# Altium PCB PCB001.PcbDoc
Units mm, origin at the board's own origin, x right, y up, seen from the top; angles counter-clockwise.
Board outline 60 x 60 mm, 4 copper layers (Top Layer, Ground Plane, Power Plane, Bottom Layer), stack 1.561 mm thick; 93 components, 70 nets, 307 pads, 114 vias.
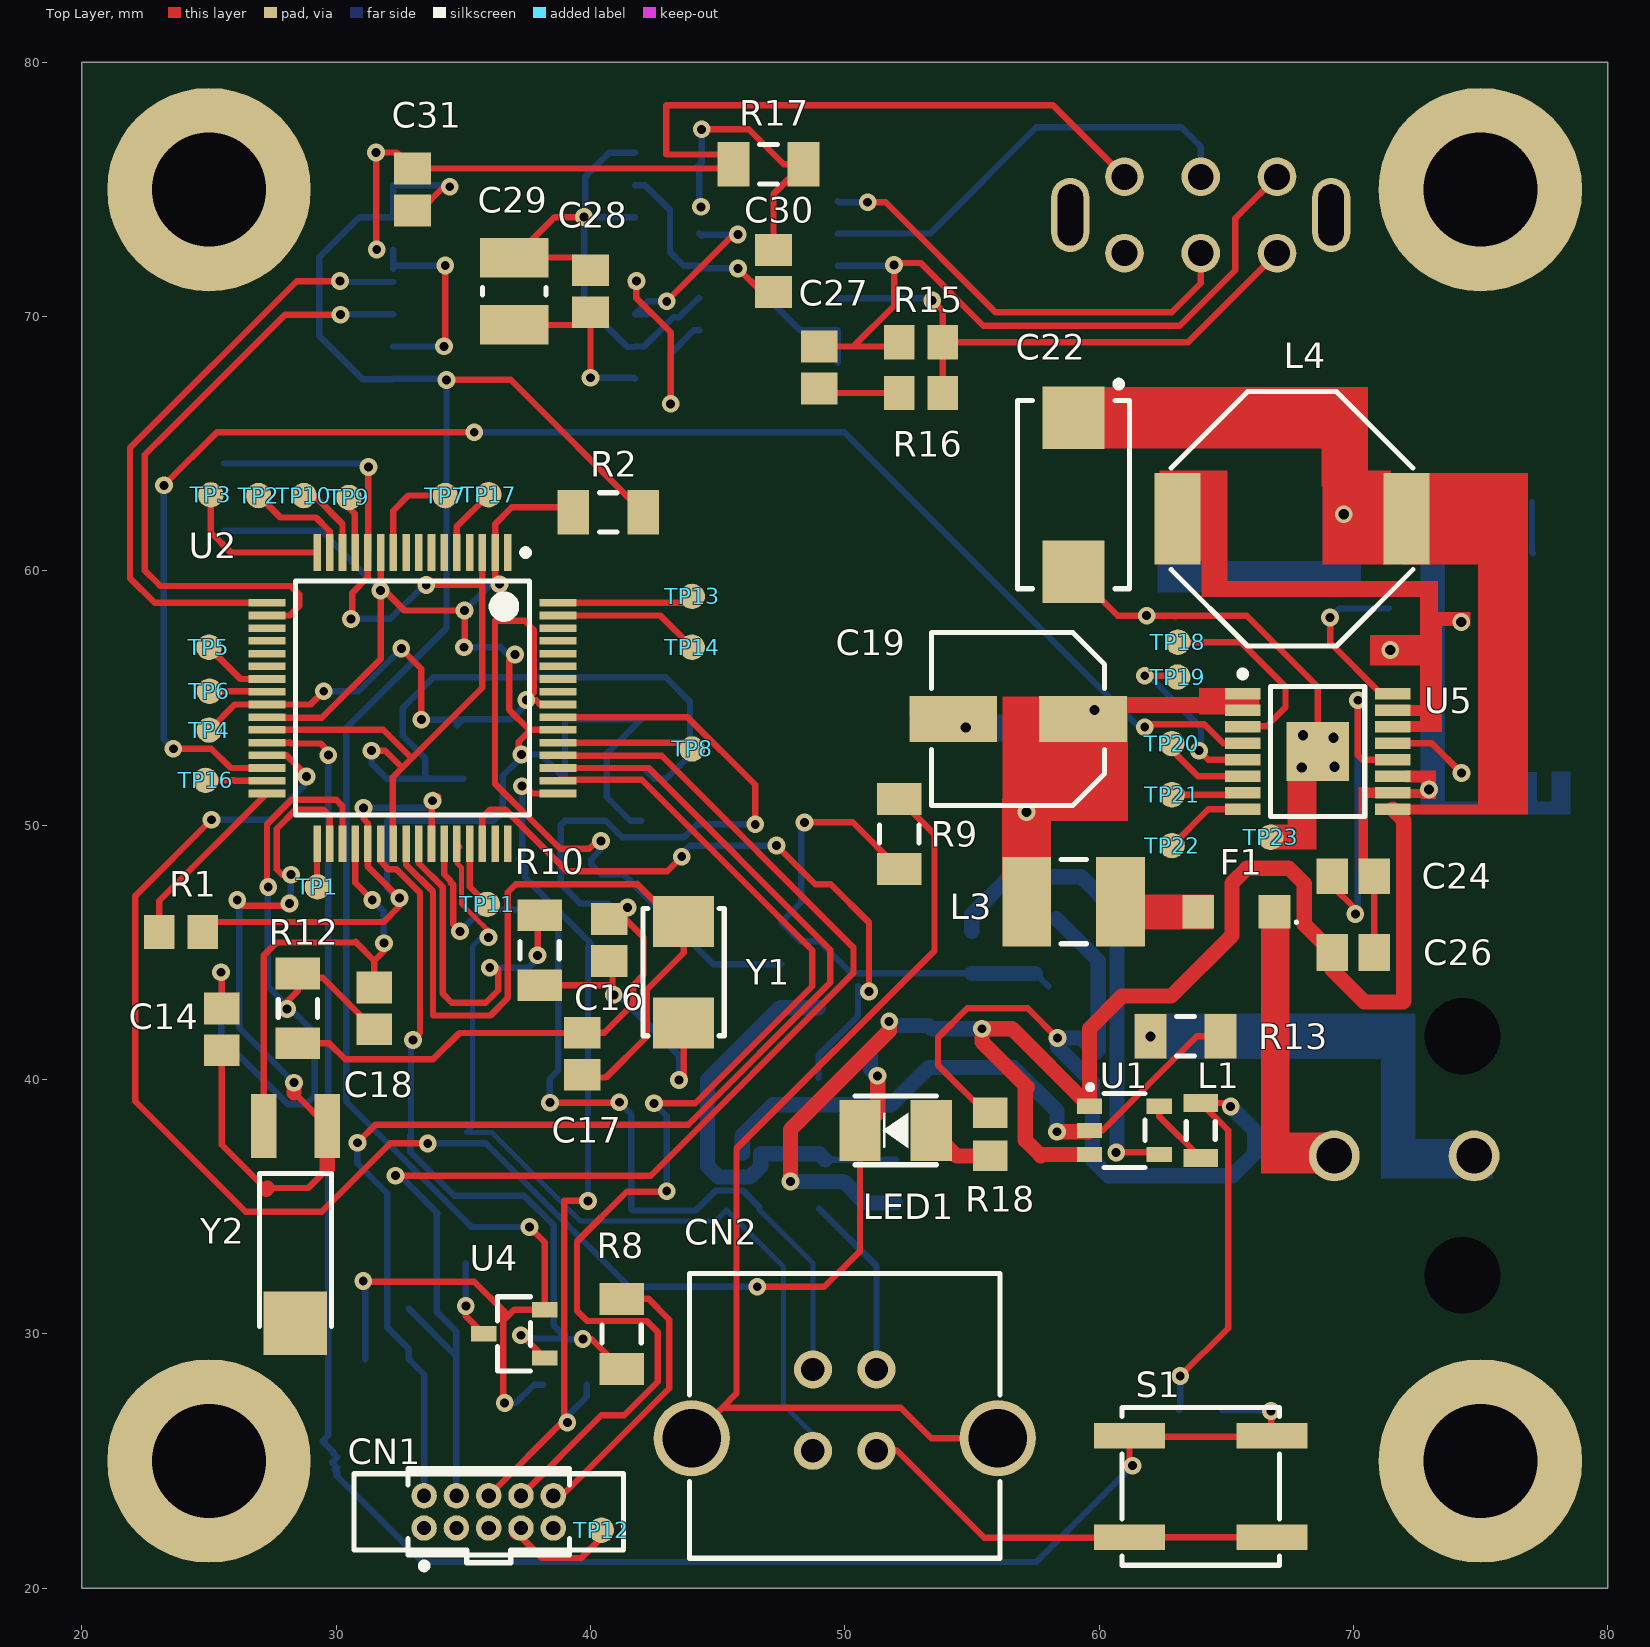
[diagram p0: Top Layer view]
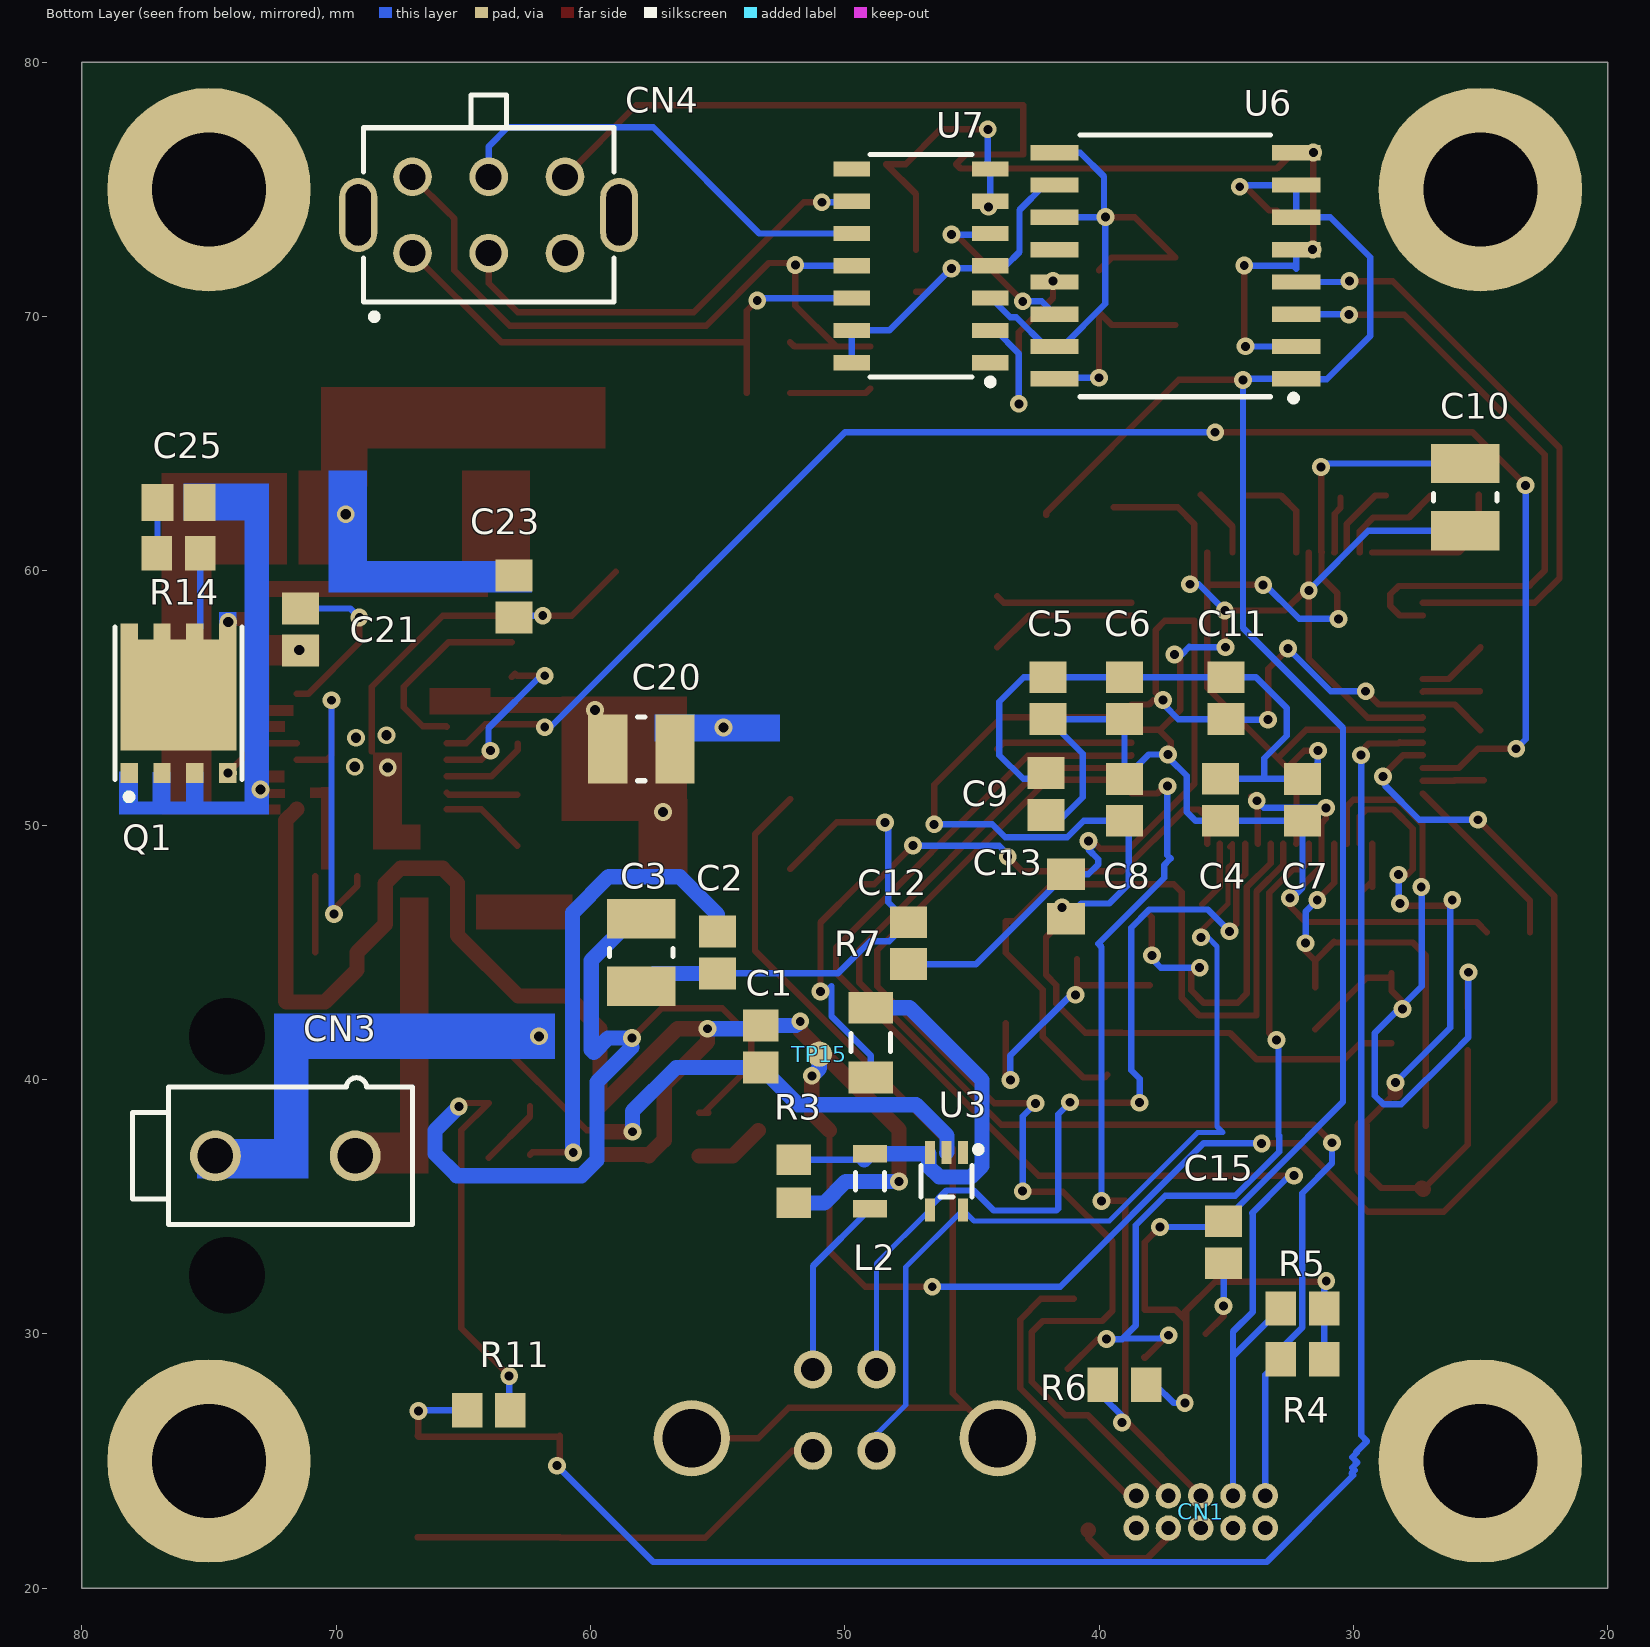
[diagram p1: Bottom Layer view, seen from below]
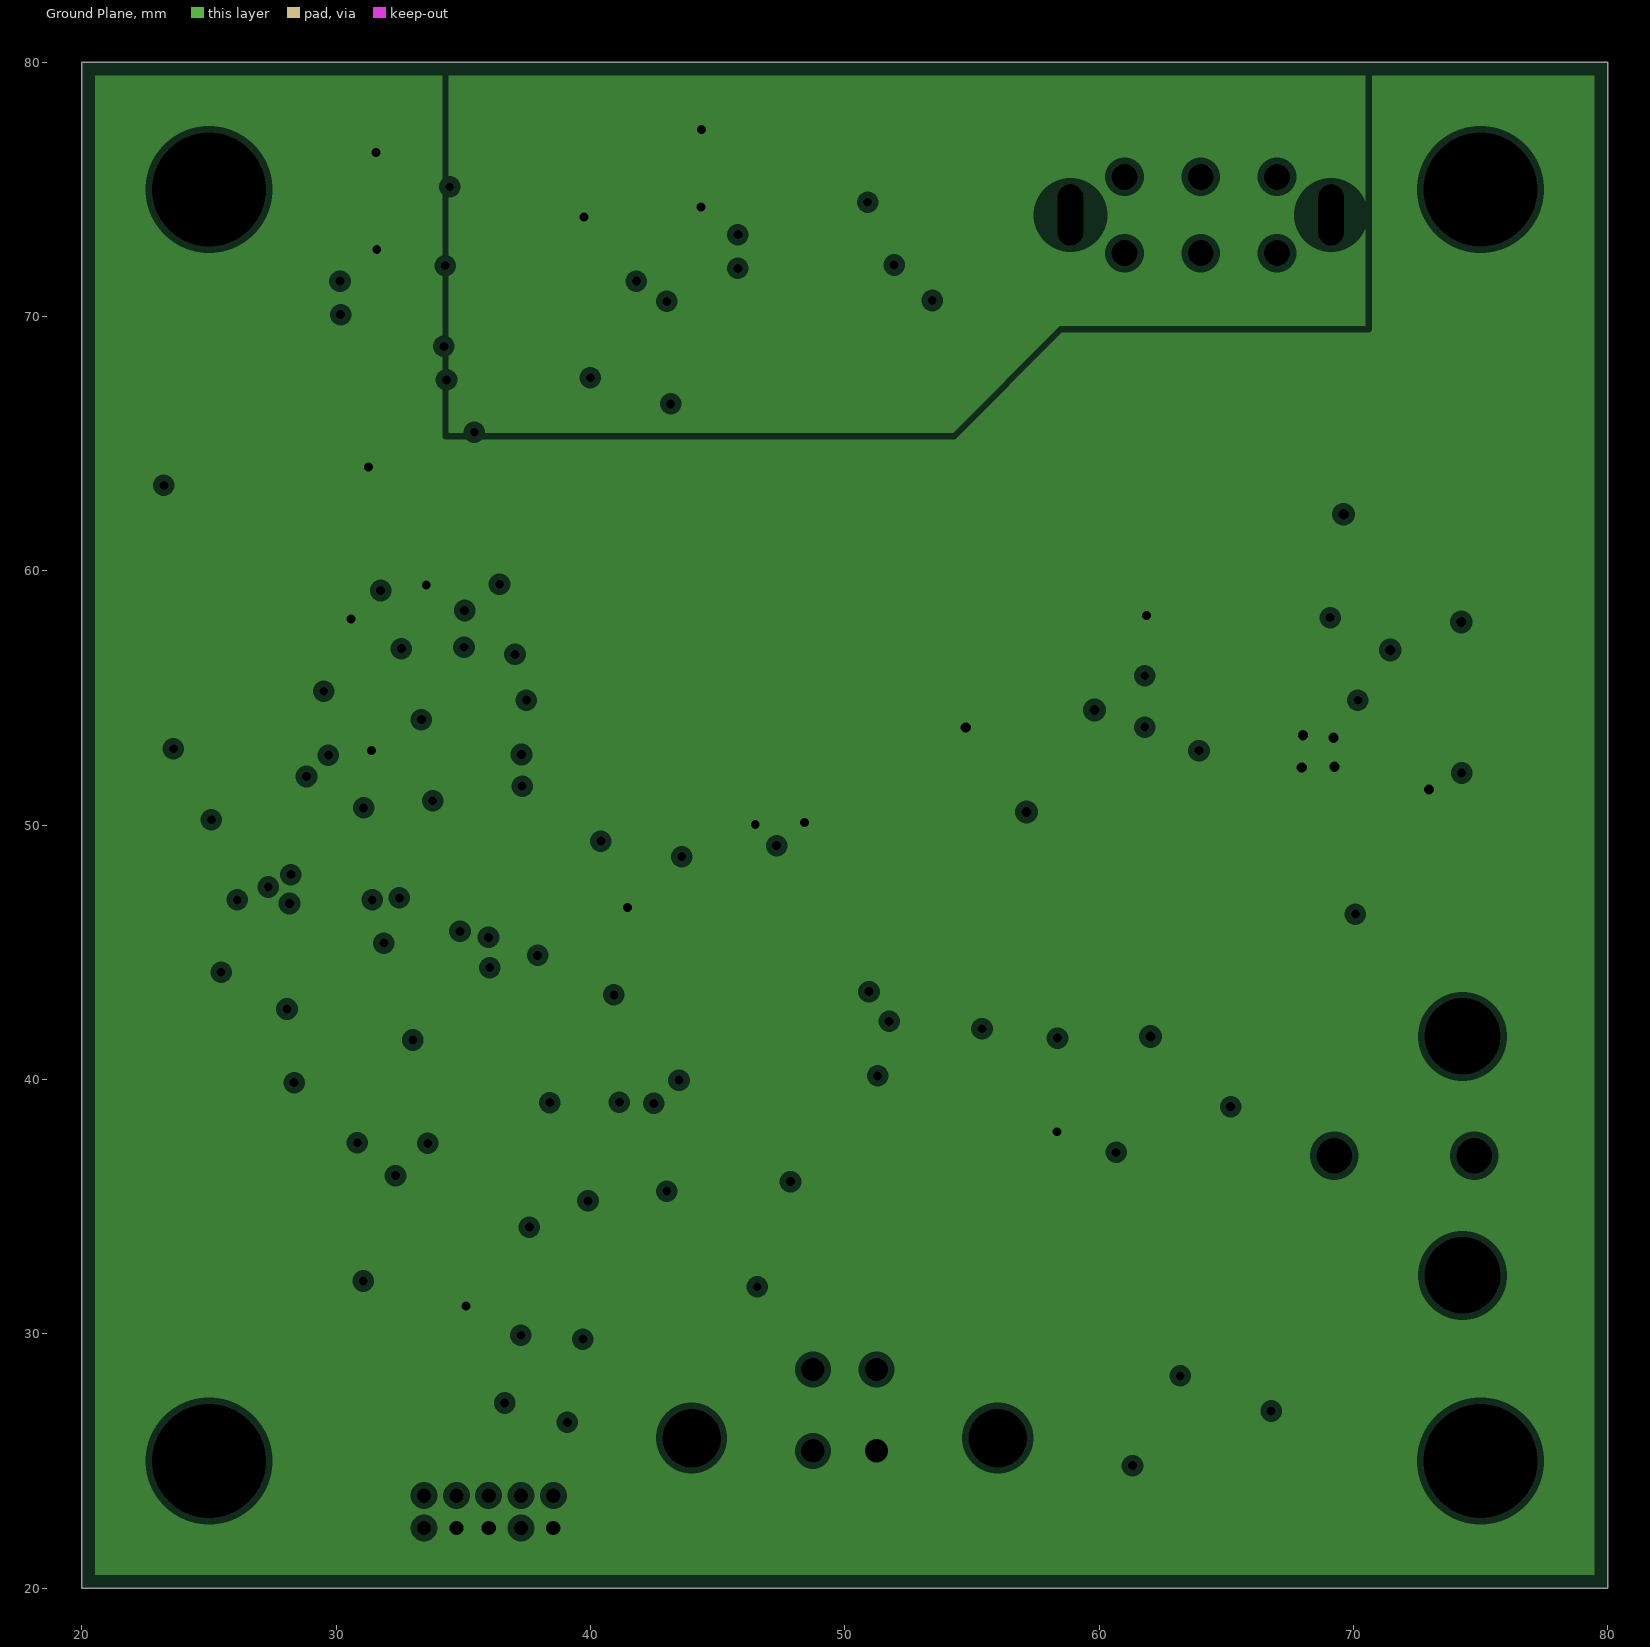
[diagram p2: Ground Plane, clearances drawn from the general rule]
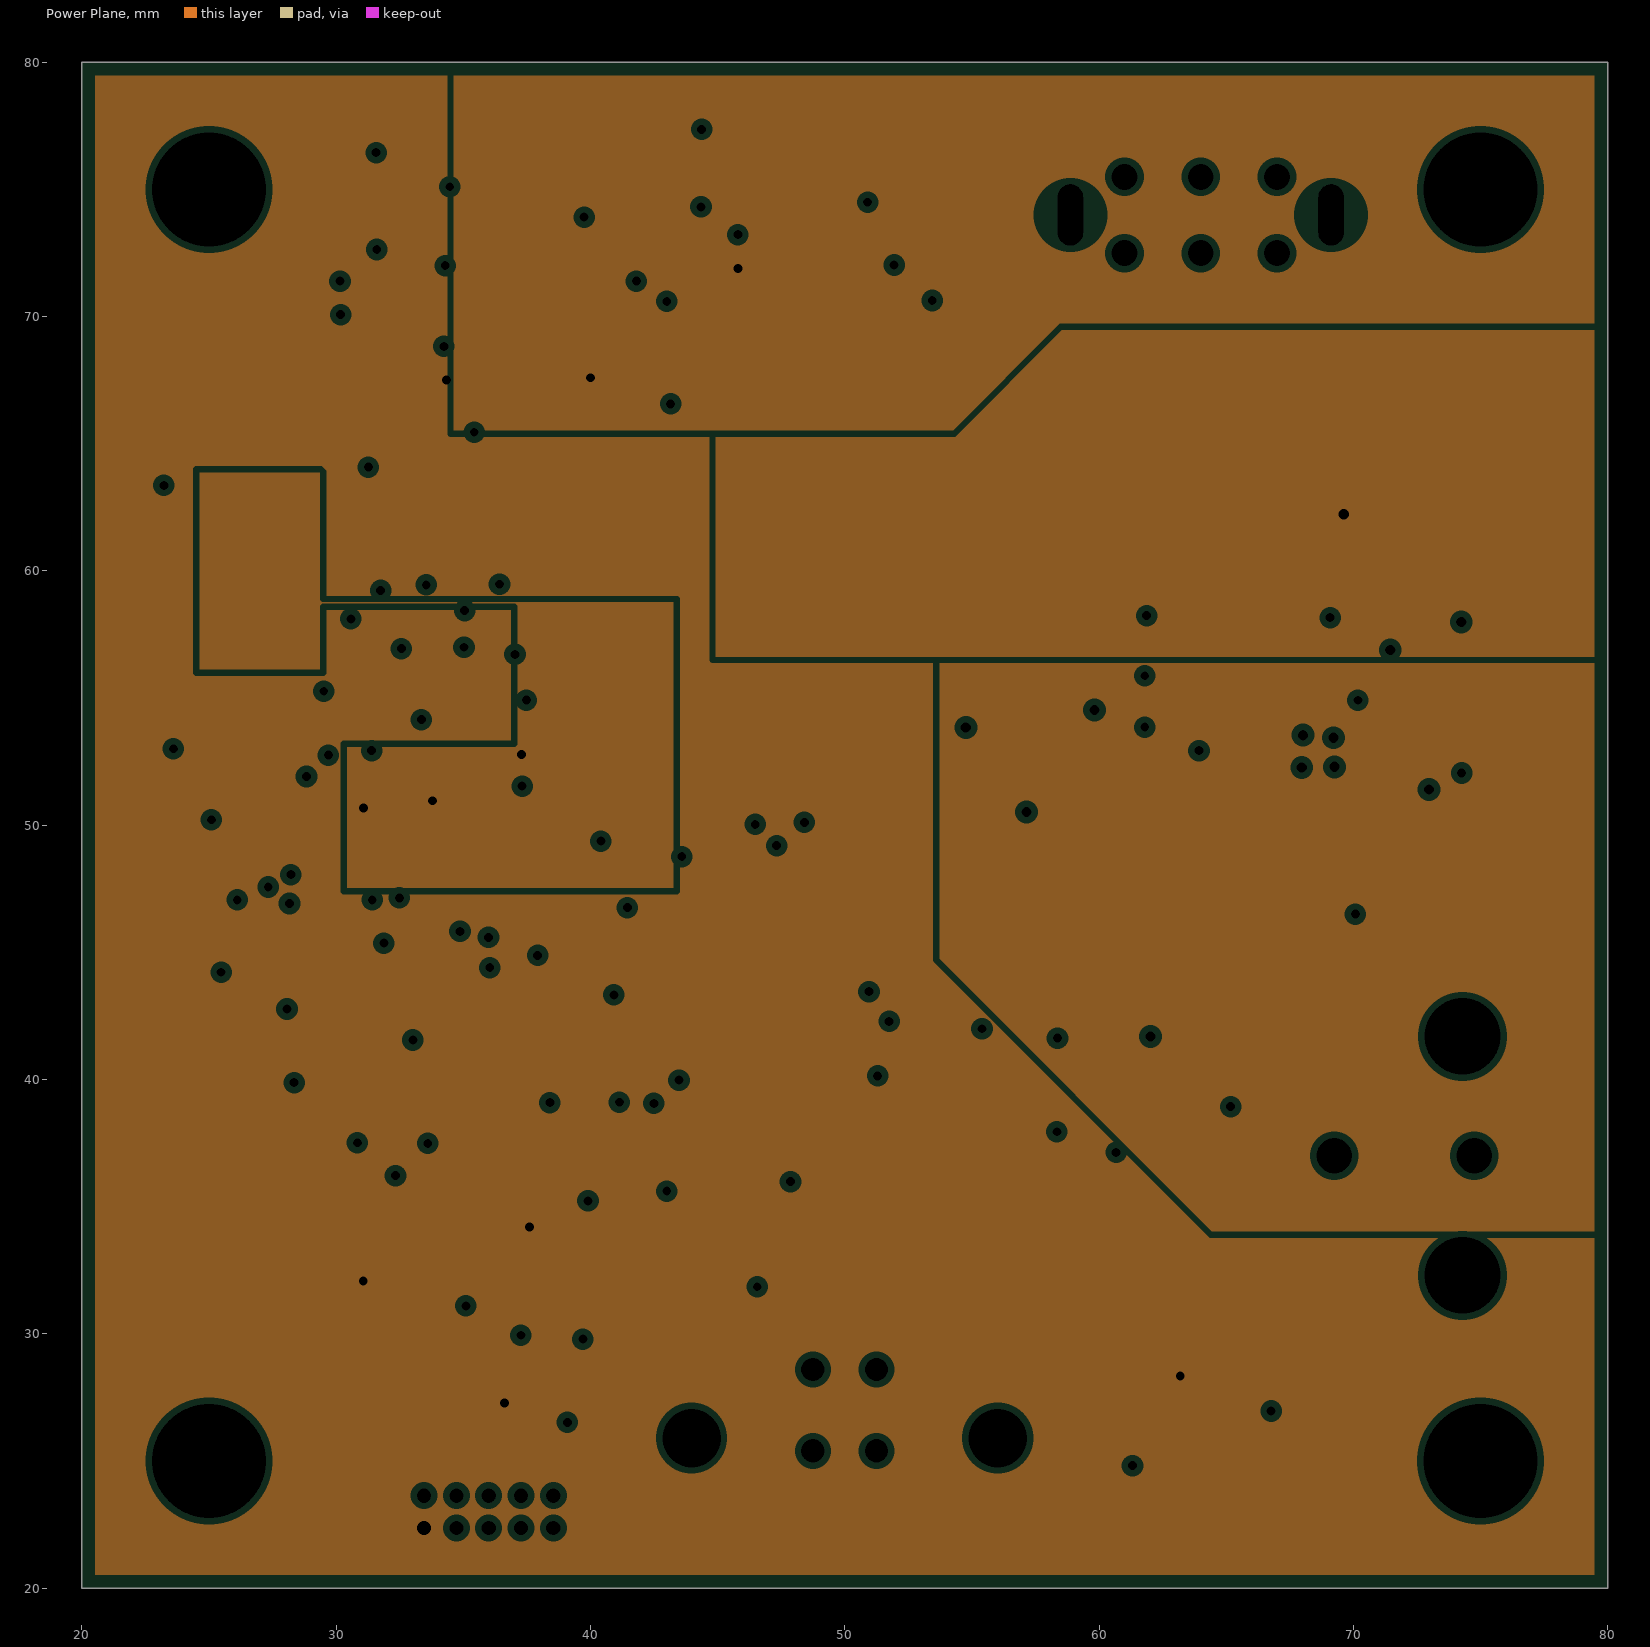
[diagram p3: Power Plane, clearances drawn from the general rule]
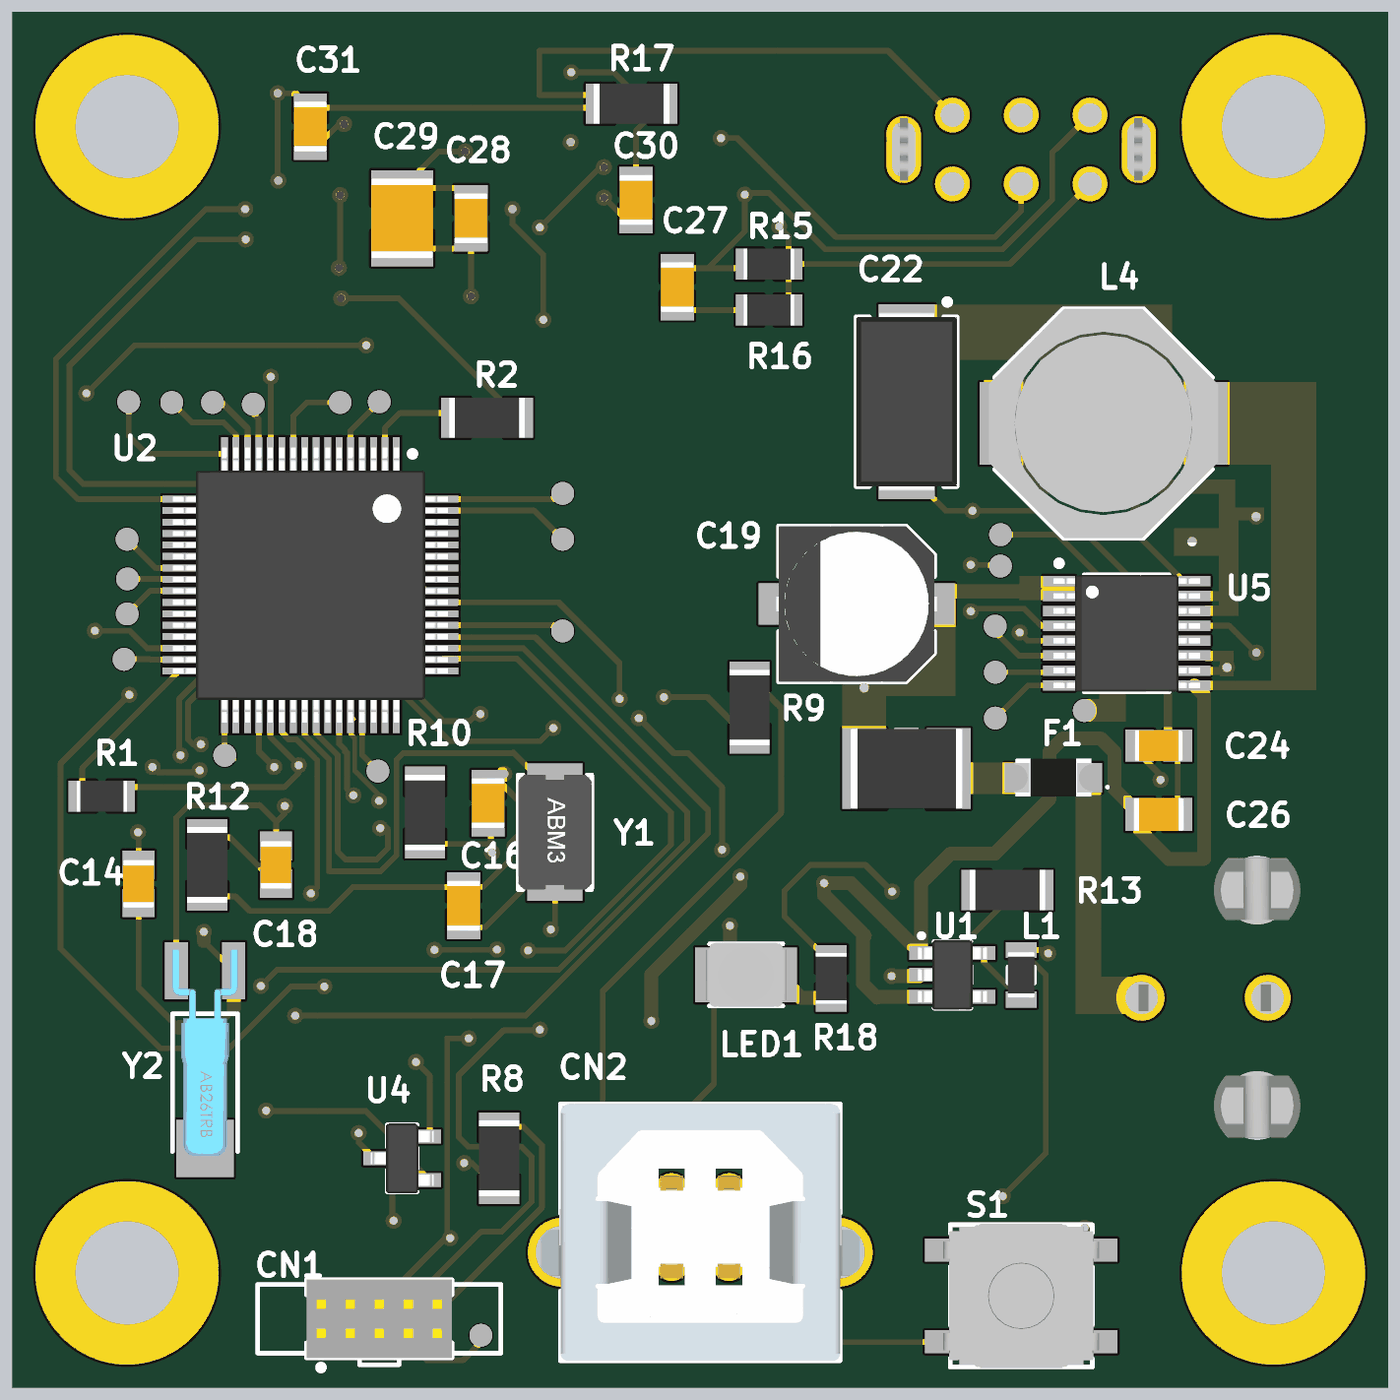
[diagram p4: 3D render of the assembled board from above, using the file's embedded part models]
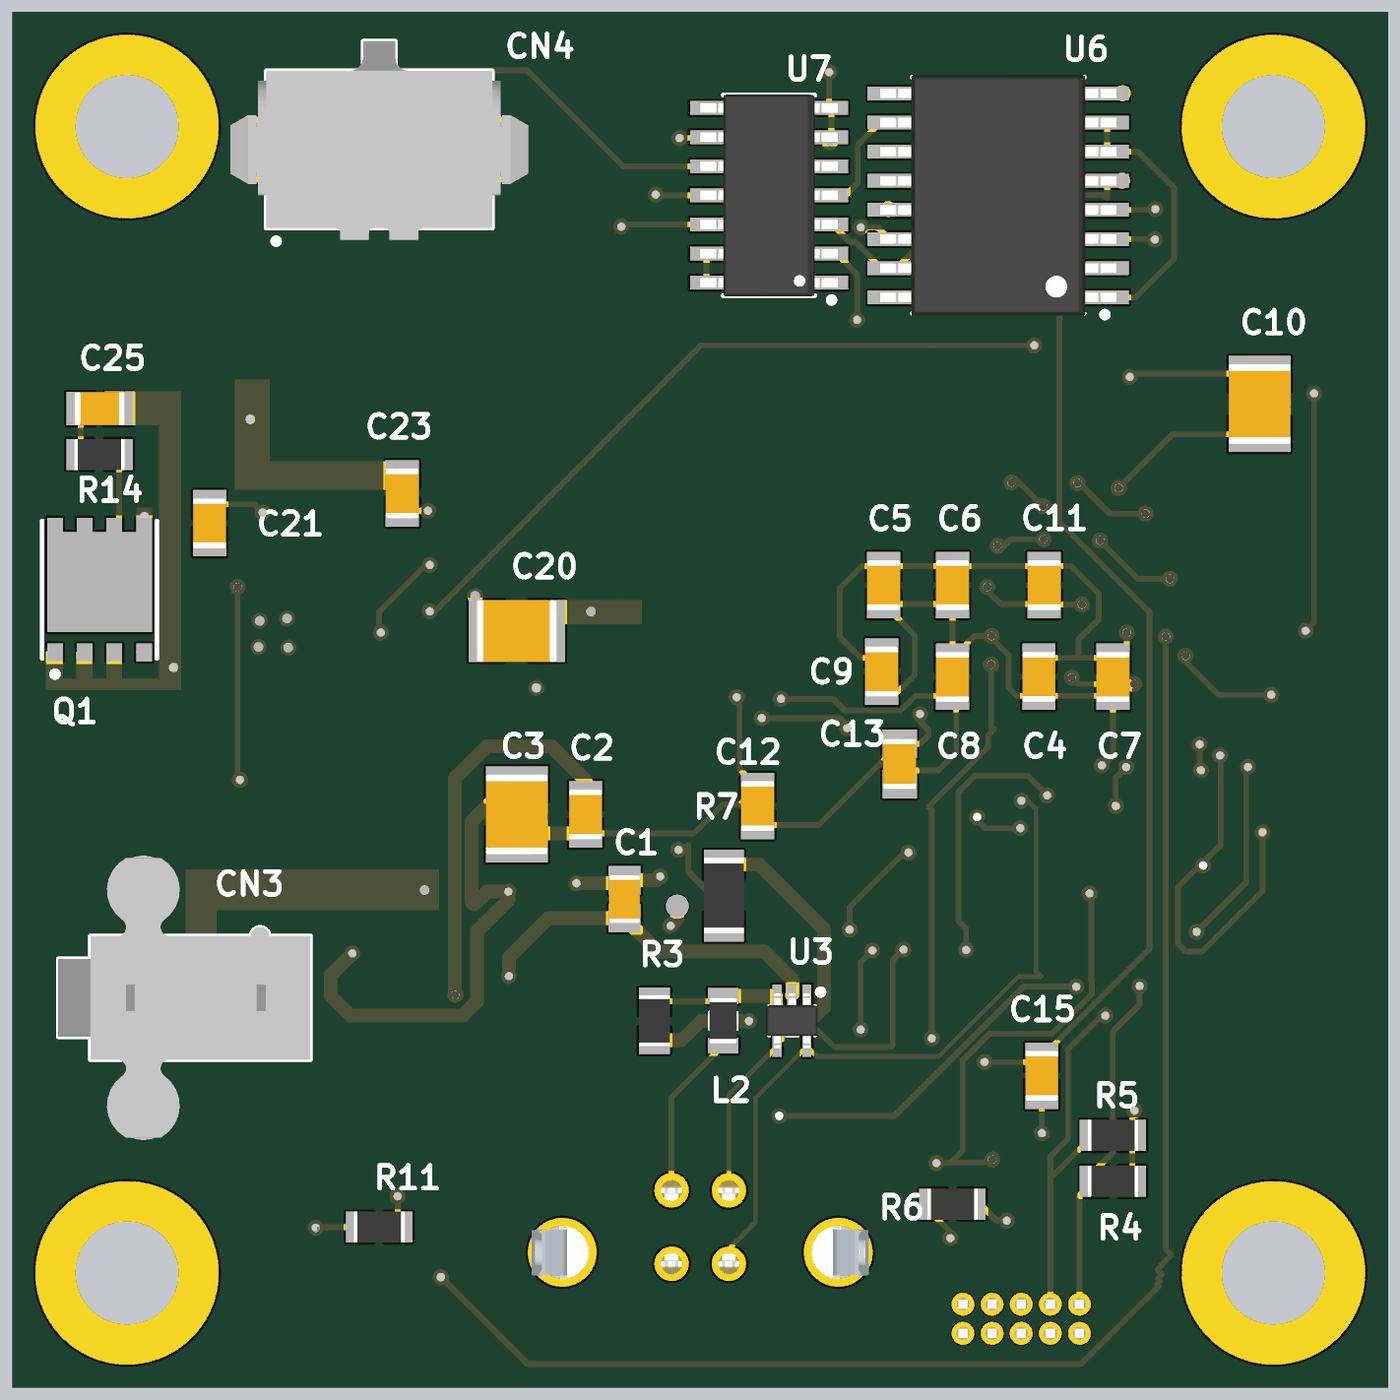
[diagram p5: 3D render of the assembled board from below, using the file's embedded part models]

## Layer stack, top to bottom
Top Solder: solder mask 0.0102, Solder Resist, Dk 3.5
Top Layer: signal copper 0.018
Dielectric 1: core 0.4572, Core-035, Dk 4.7
Ground Plane: plane copper 0.035, net (Multiple Nets)
Dielectric 2: prepreg 0.1803, PP-021, Dk 4.7
Dielectric 3: prepreg 0.1803, PP-021, Dk 4.7
Dielectric 4: prepreg 0.1803, PP-021, Dk 4.7
Power Plane: plane copper 0.035, net (Multiple Nets)
Dielectric 5: core 0.4572, Core-035, Dk 4.7
Bottom Layer: signal copper 0.018
Bottom Solder: solder mask 0.0102, Solder Resist, Dk 3.5

## Board outline
20,20 20,80 80,80 80,20

## Design rules (kind name [scope] priority, off if disabled: settings)
Clearance [All] p1: gap=0.2 ignorepadtopadclearanceinfootprint=FALSE except(0: Arc-Hole Track-Hole SMDPad-Hole THPad-Hole Via-Hole Fill-Hole Poly-Hole Region-Hole Text-Hole; 0.1: Arc-Arc Arc-Track Arc-SMDPad Arc-Text Track-Track Track-SMDPad Track-Text SMDPad-SMDPad SMDPad-Text THPad-Text Via-Text Fill-Text Poly-Text Region-Text Text-Text)
HoleSize [All] p1: absolutevalues=TRUE maxlimit=10 minlimit=0.025 maxpercent=80.000 minpercent=20.000
MinimumSolderMaskSliver [All] p1: minsoldermaskwidth=0.1
PlaneClearance [All] p1: clearance=0.25
PlaneConnect VddPlaneConnect [InNet('VDD')] p1: planeconnectstyle=Direct reliefexpansion=0.508 reliefentries=4 reliefconductorwidth=0.254 reliefairgap=0.254
PlaneConnect [All] p2: planeconnectstyle=Relief reliefexpansion=0.508 reliefentries=4 reliefconductorwidth=0.254 reliefairgap=0.254
PolygonConnect [All] p1: connectstyle=Relief reliefconductorwidth=0.254 reliefentries=4 polygonreliefangle="90 Angle" airgapwidth=0.254
RoomDefinition Sheet2 [InComponentClass('Sheet2')] p1: confinementstyle=ConfineIn formatcopy=TRUE lockcomponents=FALSE outline 30,30 79,30 79,80 30,80
RoomDefinition Sheet1 [InComponentClass('Sheet1')] p2: confinementstyle=ConfineIn formatcopy=TRUE lockcomponents=FALSE outline 20,20 69,20 69,68 20,68
RoutingVias [All] p1: holewidth=0.35 width=0.7 viastyle="Through Hole" minholewidth=0.25 minwidth=0.5 maxholewidth=1 maxwidth=2
SilkToSilkClearance [All] p1: silktosilkclearance=0
SilkToSolderMaskClearance [IsPad] p1: minsilkscreentomaskgap=0.01 clearancetoexposedcopper=TRUE
SolderMaskExpansion [All] p1: expansion=0.102 istentingtop=FALSE
Width [All] p1: maxlimit=2 minlimit=0.1 preferedwidth=0.25
24 further rules are at their usual default settings.

## Classes and differential pairs
component class Sheet2: C19 C20 C21 C22 C23 C24 C25 C26 C27 C28 C29 C30 C31 CN3 CN4 F1 L3 Q1 R13 R14 R15 R16 R17 TP18 TP19 TP20 TP21 TP22 TP23 U6 U7
component class Sheet1: C1 C2 C3 C4 C5 C6 C7 C8 C9 C10 C11 C12 C13 C14 C15 C16 C17 C18 CN1 CN2 L1 L2 LED1 R1 R2 R3 R4 R5 R6 R7 R8 R9 R10 R11 R12 R18 S1 TP1 TP2 TP3 TP4 TP5 TP6 TP7 TP8 TP9 TP10 TP11 TP12 TP13 TP14 TP15 TP16 TP17 U1 U2 U3 U4 Y1 Y2

## Components (designator, comment, footprint, x,y, rotation, side; value= is the part's Value field where it differs from the comment)
C1 "1µF" CAPC2012X135N 53.3,41.3 r270 bottom
C2 "0.01µF" CAPC2012X78N 55,45 r270 bottom
C3 "10µF" CAPC3225X250N 58,45 r270 bottom
C4 "0.1µF" CAPC2012X125N 35.23,51.003 r270 bottom
C5 "0.1µF" CAPC2012X125N 42,55 r270 bottom
C6 "0.1µF" CAPC2012X125N 39,55 r270 bottom
C7 "0.1µF" CAPC2012X125N 32,51 r270 bottom
C8 "0.01µF" CAPC2012X78N 39,51 r90 bottom
C9 "0.01µF" CAPC2012X78N 42.088,51.232 r270 bottom
C10 "10µF" CAPC3225X250N 25.6,62.9 r270 bottom
C11 "0.1µF" CAPC2012X125N 35,55 r270 bottom
C12 "0.1µF" CAPC2012X125N 47.498,45.364 r270 bottom
C13 "2.2µF" CAPC2012X145N 41.3,47.2 r270 bottom
C14 "24pF" CAPC2012X75N 25.5,41.975 r90 top
C15 "0.1µF" CAPC2012X125N 35.1,33.6 r270 bottom
C16 "10pF" CAPC2012X94N 40.742,45.491 r90 top
C17 "10pF" CAPC2012X94N 39.678,41.014 r90 top
C18 "24pF" CAPC2012X75N 31.5,42.8 r90 top
C19 "100µF" CAPAE660X770N 56.82,54.178 r180 top
C20 "10µF" CAPC3225X250N 58,53 r180 bottom
C21 "0.1µF" CAPC2012X125N 71.4,57.7 r270 bottom
C22 "180µF" CAPMP7343X190N 59,63 r270 top
C23 "0.1µF" CAPC2012X125N 63,59 r270 bottom
C24 "1µF" CAPC2012X135N 70,48 r0 top
C25 "1500pF" CAPC2012X100N 76.2,62.7 r180 bottom
C26 "0.1µF" CAPC2012X125N 70,45 r0 top
C27 "4700pF" CAPC2012X78N 49,68 r90 top
C28 "0.1µF" CAPC2012X125N 40,71 r90 top
C29 "10µF" CAPC3225X250N 37,71 r90 top
C30 "0.1µF" CAPC2012X125N 47.2,71.8 r90 top
C31 "0.1µF" CAPC2012X125N 33,75 r90 top
CN1 "GRPB052VWVN-RC" SULLINS_GRPB052VWVN-RC 36,23 r0 bottom
CN2 "61400413321" WURTH_61400413321 50,27 r0 top
CN3 "39-29-9029" MOLEX_39-29-9029 72,37 r90 bottom locked
CN4 "3-794682-6" TYCO_3-794682-6 64,74 r180 bottom
F1 "3A, 32V" FUSE_0468XXX.NR 65.4,46.6 r180 top
L1 "742792093" INDC2012X90N 64,38 r90 top
L2 "742792093" INDC2012X90N 49,36 r270 bottom
L3 "FBMH4532HM132-T" INDC4532X350N 59,47 r180 top
L4 "15µH" IND_SRU1038-150Y 67.589,62.052 r0 top
LED1 "597-3121-207F" DIALIGHT_597-3121-207F 52,38 r0 top
Q1 "CSD16321Q5" TI_CSD16321Q5 76.2,54.8 r90 bottom
R1 "1M" RESC2012X60N 23.9,45.8 r0 top
R2 "0" RESC3216X60N 40.7,62.3 r0 top
R3 "DNP" RESC2012X60N 52,36 r270 bottom
R4 "10k" RESC2012X60N 32,29 r180 bottom
R5 "10k" RESC2012X60N 32,31 r180 bottom
R6 "10k" RESC2012X60N 39,28 r180 bottom
R7 "0" RESC3216X60N 48.971,41.453 r90 bottom
R8 "0" RESC3216X60N 41.224,29.997 r90 top
R9 "0" RESC3216X60N 52.146,49.657 r90 top
R10 "0" RESC3216X60N 37.998,45.085 r90 top
R11 "10k" RESC2012X60N 64,27 r180 bottom
R12 "0" RESC3216X60N 28.5,42.8 r90 top
R13 "0" RESC3216X60N 63.4,41.7 r180 top
R14 "4.7" RESC2012X60N 76.2,60.7 r180 bottom
R15 "DNP" RESC2012X60N 53,69 r0 top
R16 "110" RESC2012X60N 53,67 r0 top
R17 "0" RESC3216X60N 47,76 r180 top
R18 "1.5k" RESC2012X60N 55.721,37.848 r90 top
S1 "KSC241JLFS" SW_KSC241JLFS 64,24 r180 top locked
TP1 "TESTPOINT100" TP100 29.261,47.574 r0 top
TP2 "TESTPOINT100" TP100 26.949,62.967 r0 top
TP3 "TESTPOINT100" TP100 25.07,62.992 r0 top
TP4 "TESTPOINT100" TP100 25.006,53.743 r0 top
TP5 "TESTPOINT100" TP100 25,57 r0 top
TP6 "TESTPOINT100" TP100 25.019,55.27 r0 top
TP7 "TESTPOINT100" TP100 34.29,62.967 r0 top
TP8 "TESTPOINT100" TP100 44,53 r0 top
TP9 "TESTPOINT100" TP100 30.505,62.89 r0 top
TP10 "TESTPOINT100" TP100 28.727,62.967 r90 top
TP11 "TESTPOINT100" TP100 35.941,46.888 r90 top
TP12 "TESTPOINT100" TP100 40.432,22.279 r90 top
TP13 "TESTPOINT100" TP100 44,59 r90 top
TP14 "TESTPOINT100" TP100 44,57 r90 top
TP15 "TESTPOINT100" TP100 51,41 r90 bottom
TP16 "TESTPOINT100" TP100 24.867,51.765 r90 top
TP17 "TESTPOINT100" TP100 36,63 r90 top
TP18 "TESTPOINT100" TP100 63.1,57.2 r90 top
TP19 "TESTPOINT100" TP100 63.094,55.829 r90 top
TP20 "TESTPOINT100" TP100 62.865,53.213 r90 top
TP21 "TESTPOINT100" TP100 62.871,51.2 r90 top
TP22 "TESTPOINT100" TP100 62.871,49.2 r90 top
TP23 "TESTPOINT100" TP100 66.751,49.53 r90 top
U1 "TPS73233DBVT" SOT95P280X145-5N 61,38 r0 top
U2 "TM4C123GH6PMI" QFP50P1200X1200X140-64N 33,55 r270 top
U3 "SP3003-02JTG" SOT65P220X90-5N 46,36 r270 bottom
U4 "DS1818R-10+T&R" SOT95P235X100-3N 37,30 r180 top
U5 "TPS54357PWP" SOP65P640X120-17AN 68.6,52.9 r0 top
U6 "ADUM5201ARWZ" SOIC127P1030X265-16N 37,72 r0 bottom
U7 "ADM3491ARZ" SOIC127P600X175-14N 47,72 r0 bottom
Y1 "16 MHz" XTAL500X320X130 43.663,44.221 r0 top
Y2 "32.768 kHz" ABRACON_AB26TRB-32.768KHZ-T 28.4,34.3 r90 top

## Footprints (in the part's own frame and the unit in brackets; to place one, negate y for a bottom-side part, rotate by r counter-clockwise, add the part's x,y. Pads: shape width x height; smd on the part's side, far side on the other; paste and mask are expansions set on the pad)
ABRACON_AB26TRB-32.768KHZ-T [mm] "Low Frequency Cylindrical Watch Crystal"
  rect 2.5x2.5 smd: 0(-3.875,0)
  rect 2.5x1 smd: 1(3.875,1.25) 2(3.875,-1.25)
  silkscreen extent -4,-1.42 2,1.42, body extent -4.2,-1.42 4.8,1.42, height 2.25
CAPAE660X770N [mm] "Aluminum Electrolytic Capacitor, Body 6.60x6.60x8.00mm, IPC Low Density"
  rect 3.45x1.8 smd: 1(-2.55,0) 2(2.55,0)
  Top Layer keep-out region: -4.4,1
  Top Layer keep-out region: -4.4,1
  silkscreen extent -3.4,-3.4 3.4,3.4, body extent -3.5,-3.4 3.5,3.4, height 8
CAPC2012X75N [mm] "Chip Capacitor, 2-Leads, Body 2.00x1.25mm, IPC Medium Density"
  rect 1.25x1.4 smd: 1(-0.825,0) 2(0.825,0)
  body extent -1.05,-0.67 1.05,0.67, height 0.75
CAPC2012X78N [mm] "Chip Capacitor, 2-Leads, Body 2.00x1.25mm, IPC Medium Density"
  rect 1.25x1.45 smd: 1(-0.825,0) 2(0.825,0)
  body extent -1.1,-0.73 1.1,0.72, height 0.78
CAPC2012X94N [mm] "Chip Capacitor, 2-Leads, Body 2.00x1.25mm, IPC Medium Density"
  rect 1.25x1.45 smd: 1(-0.825,0) 2(0.825,0)
  body extent -1.1,-0.72 1.1,0.72, height 0.94
CAPC2012X100N [mm] "Chip Capacitor, 2-Leads, Body 2.00x1.25mm, IPC Medium Density"
  rect 1.25x1.45 smd: 1(-0.825,0) 2(0.825,0)
  body extent -1.1,-0.72 1.1,0.72, height 1
CAPC2012X125N [mm] "Chip Capacitor, 2-Leads, Body 2.00x1.25mm, IPC Medium Density"
  rect 1.25x1.45 smd: 1(-0.825,0) 2(0.825,0)
  body extent -1.1,-0.73 1.1,0.72, height 1.25
CAPC2012X135N [mm] "Chip Capacitor, 2-Leads, Body 2.00x1.25mm, IPC Medium Density"
  rect 1.25x1.4 smd: 1(-0.825,0) 2(0.825,0)
  body extent -1.05,-0.68 1.05,0.67, height 1.35
CAPC2012X145N [mm]
  rect 1.25x1.5 smd: 1(-0.875,0) 2(0.875,0)
  body extent -1.1,-0.73 1.1,0.72, height 1.45
CAPC3225X250N [mm]
  rect 1.55x2.7 smd: 1(-1.325,0) 2(1.325,0)
  silkscreen extent -0.15,-1.25 0.15,1.25, body extent -1.75,-1.35 1.75,1.35, height 2.7
CAPMP7343X190N [mm] "Molded Capacitor, 2-Leads, Body 7.25x4.25mm, IPC Medium Density"
  rect 2.45x2.45 smd: 1(-3.025,0) 2(3.025,0)
  silkscreen extent -4.47,-2.2 3.7,2.2, body extent -3.92,-2.2 3.92,2.2, height 4.3
DIALIGHT_597-3121-207F [mm] "Micro LED, 597 Series, Red, SMD LED"
  rect 1.63x2.4 smd: 1(-1.4,0) 2(1.4,0)
  silkscreen extent -1.6,-1.35 1.6,1.35, body extent -1.75,-1.4 1.75,1.4, height 2.06
FUSE_0468XXX.NR [mm] "Chip Array, Concave, 2-Leads, Pitch 1.27mm,  Body 1.52x3.18mm,  IPC Medium Density"
  rect 1.25x1.3 smd: 1(-1.5,0) 2(1.5,0)
  silkscreen extent -2.41,0.36 -2.31,0.46, body extent -1.71,-0.82 1.71,0.82, height 0.76
IND_SRU1038-150Y [mm]
  rect 1.8x3.6 smd: 1(-4.5,0) 2(4.5,0)
  silkscreen extent -4.75,-5 4.75,5, body extent -5,-5 5,5, height 3.8
INDC2012X90N [mm] "Chip Inductor, 2-Leads, Body 2.00x1.20mm, IPC Medium Density"
  rect 0.7x1.34 smd: 1(-1.08,0) 2(1.08,0)
  silkscreen extent -0.35,-0.57 0.35,0.57, body extent -1,-0.6 1,0.6, height 0.9
INDC4532X350N [mm] "Chip Inductor, 2-Leads, Body 4.50x3.20mm, IPC Medium Density"
  rect 1.92x3.52 smd: 1(-1.84,0) 2(1.84,0)
  silkscreen extent -0.5,-1.66 0.5,1.66, body extent -2.45,-1.75 2.45,1.75, height 3.5
MOLEX_39-29-9029 [mm] "Mini-Fit Jr. Header, Dual Row, Vertical, with Snap-in Plastic Peg PCB Lock, 2 Circuits, PA Polyamide Nylon 6/6 94V-2, 0.76µm Gold (Au) Plating"
  round 0 hole 3 unplated: 0(-4.7,2.29) 0(4.7,2.29)
  round 2 hole 1.4: 1(0,-2.75) 2(0,2.75)
  silkscreen extent -2.7,-5 3.08,6, body extent -6.09,-5 6.09,6, height 12.85
QFP50P1200X1200X140-64N [mm] "TSQFP, 64-Leads, Body 10.00x10.00mm, Pitch 0.50mm, IPC Medium Density"
  rect 1.45x0.3 smd: 1(-5.725,3.75) 2(-5.725,3.25) 3(-5.725,2.75) 4(-5.725,2.25) 5(-5.725,1.75) 6(-5.725,1.25) 7(-5.725,0.75) 8(-5.725,0.25) 9(-5.725,-0.25) 10(-5.725,-0.75) 11(-5.725,-1.25) 12(-5.725,-1.75) 13(-5.725,-2.25) 14(-5.725,-2.75) 15(-5.725,-3.25) 16(-5.725,-3.75) 33(5.725,-3.75) 34(5.725,-3.25) 35(5.725,-2.75) 36(5.725,-2.25) 37(5.725,-1.75) 38(5.725,-1.25) 39(5.725,-0.75) 40(5.725,-0.25) 41(5.725,0.25) 42(5.725,0.75) 43(5.725,1.25) 44(5.725,1.75) 45(5.725,2.25) 46(5.725,2.75) 47(5.725,3.25) 48(5.725,3.75)
  rect 0.3x1.45 smd: 17(-3.75,-5.725) 18(-3.25,-5.725) 19(-2.75,-5.725) 20(-2.25,-5.725) 21(-1.75,-5.725) 22(-1.25,-5.725) 23(-0.75,-5.725) 24(-0.25,-5.725) 25(0.25,-5.725) 26(0.75,-5.725) 27(1.25,-5.725) 28(1.75,-5.725) 29(2.25,-5.725) 30(2.75,-5.725) 31(3.25,-5.725) 32(3.75,-5.725) 49(3.75,5.725) 50(3.25,5.725) 51(2.75,5.725) 52(2.25,5.725) 53(1.75,5.725) 54(1.25,5.725) 55(0.75,5.725) 56(0.25,5.725) 57(-0.25,5.725) 58(-0.75,5.725) 59(-1.25,5.725) 60(-1.75,5.725) 61(-2.25,5.725) 62(-2.75,5.725) 63(-3.25,5.725) 64(-3.75,5.725)
  silkscreen extent -5.85,-4.6 4.6,4.6, body extent -6,-6 6,6, height 1.45
RESC2012X60N [mm] "Chip Resistor, 2-Leads, Body 2.00x1.25mm, IPC Medium Density"
  rect 1.2x1.35 smd: 1(-0.85,0) 2(0.85,0)
  body extent -1.1,-0.67 1.1,0.68, height 0.6
RESC3216X60N [mm] "Chip Resistor, 2-Leads, Body 3.15x1.60mm, IPC Medium Density"
  rect 1.25x1.75 smd: 1(-1.375,0) 2(1.375,0)
  silkscreen extent -0.35,-0.77 0.35,0.77, body extent -1.65,-0.88 1.65,0.87, height 0.65
SOIC127P600X175-14N [mm] "SOIC, 14-Leads, Body 8.65x3.90mm, Pitch 1.27mm, IPC Medium Density"
  rect 1.45x0.6 smd: 1(-2.725,3.81) 2(-2.725,2.54) 3(-2.725,1.27) 4(-2.725,0) 5(-2.725,-1.27) 6(-2.725,-2.54) 7(-2.725,-3.81) 8(2.725,-3.81) 9(2.725,-2.54) 10(2.725,-1.27) 11(2.725,0) 12(2.725,1.27) 13(2.725,2.54) 14(2.725,3.81)
  silkscreen extent -2.85,-4.38 2,4.69, body extent -3,-4.4 3,4.4, height 1.75
SOIC127P1030X265-16N [mm] "SOIC, 16-Leads, Body 10.30x7.50mm, Pitch 1.27mm, IPC Medium Density"
  rect 1.9x0.6 smd: 1(-4.75,4.445) 2(-4.75,3.175) 3(-4.75,1.905) 4(-4.75,0.635) 5(-4.75,-0.635) 6(-4.75,-1.905) 7(-4.75,-3.175) 8(-4.75,-4.445) 9(4.75,-4.445) 10(4.75,-3.175) 11(4.75,-1.905) 12(4.75,-0.635) 13(4.75,0.635) 14(4.75,1.905) 15(4.75,3.175) 16(4.75,4.445)
  silkscreen extent -4.77,-5.15 3.75,5.32, body extent -5.16,-5.25 5.16,5.25, height 2.65
SOP65P640X120-17AN [mm] "TSOP, 16-Leads, Body 5.00x4.40mm, Pitch 0.65mm, Thermal Pad 2.31x2.46mm, IPC Medium Density"
  rect 1.4x0.45 smd: 1(-2.95,2.275) 2(-2.95,1.625) 3(-2.95,0.975) 4(-2.95,0.325) 5(-2.95,-0.325) 6(-2.95,-0.975) 7(-2.95,-1.625) 8(-2.95,-2.275) 9(2.95,-2.275) 10(2.95,-1.625) 11(2.95,-0.975) 12(2.95,-0.325) 13(2.95,0.325) 14(2.95,0.975) 15(2.95,1.625) 16(2.95,2.275)
  rect 2.46x2.31 smd: 17(0,0)
  silkscreen extent -3.07,-2.55 1.85,3.17, body extent -3.2,-2.55 3.2,2.55, height 1.2
SOT65P220X90-5N [mm] "SOT23, 5-Leads, Body 2.05x2.20mm, Pitch 0.65mm, IPC Medium Density"
  rect 0.9x0.4 smd: 1(-1.125,0.65) 2(-1.125,0) 3(-1.125,-0.65) 4(1.125,-0.65) 5(1.125,0.65)
  silkscreen extent -1.37,-1 0.63,1.37, body extent -1.2,-1.13 1.2,1.12, height 1.1
SOT95P235X100-3N [mm] "SOT23, 3-Leads, Body 2.92x2.37mm, Pitch 0.95mm, IPC Medium Density"
  rect 1x0.6 smd: 1(-1.2,0.95) 2(-1.2,-0.95) 3(1.2,0)
  silkscreen extent -0.65,-1.46 0.65,1.46, body extent -1.37,-1.52 1.37,1.52, height 1.12
SOT95P280X145-5N [mm] "SOT23, 5-Leads, Body 2.90x2.80mm, Pitch 0.95mm, IPC Medium Density"
  rect 1x0.6 smd: 1(-1.375,0.95) 2(-1.375,0) 3(-1.375,-0.95) 4(1.375,-0.95) 5(1.375,0.95)
  silkscreen extent -1.45,-1.45 0.8,1.8, body extent -1.5,-1.53 1.5,1.53, height 1.45
SULLINS_GRPB052VWVN-RC [mm]
  round 1 hole 0.56 mask+0.051: 1(-2.54,0.635) 2(-2.54,-0.635) 3(-1.27,0.635) 4(-1.27,-0.635) 5(0,0.635) 6(0,-0.635) 7(1.27,0.635) 8(1.27,-0.635) 9(2.54,0.635) 10(2.54,-0.635)
  body extent -3.17,-1.71 3.18,1.71, height 3.91
SW_KSC241JLFS [mm] "Sealed Tact Switch"
  rect 2.8x1 smd: 1(-2.8,2) 1(2.8,2) 2(-2.8,-2) 2(2.8,-2)
  silkscreen extent -3.1,-3.1 3.1,3.1, body extent -3.4,-3.15 3.4,3.15, height 3.5
TI_CSD16321Q5 [mil] "25V, 31 A, N-Channel Power MOSFET"
  rect 172x180 smd: D(13,0)
  rect 31x27 smd: D(108,-76.5) D(108,-25.5) D(108,25.5) D(108,76.5) G(-108,-76.5) S(-108,-25.5) S(-108,25.5) S(-108,76.5)
  silkscreen extent -150,-98 118,98, body extent -118,-98 118,98, height 41
TP100 [mm] "Surface Mount Test Point"
  round 1 smd mask+0.051: 1(0,0)
TYCO_3-794682-6 [mm]
  oval 1.5x2.91 hole 1 slot 2.41 at 90 deg: 0(-5.13,0) 0(5.13,0)
  round 1.52 hole 1.02: 1(-3,-1.5) 2(-3,1.5) 3(0,-1.5) 4(0,1.5) 5(3,-1.5) 6(3,1.5)
  silkscreen extent -4.93,-4.12 4.93,4.72, body extent -6.5,-3.94 6.5,4.73, height 9.25
WURTH_61400413321 [mm] "Connector Receptacle USB Type B 4 Position Through Hole, Vertical"
  round 3 hole 2.3: 0(-6.02,-1.1) 0(6.02,-1.1)
  round 1.5 hole 0.92: 1(1.25,1.6) 2(-1.25,1.6) 3(-1.25,-1.6) 4(1.25,-1.6)
  silkscreen extent -6.1,-5.83 6.1,5.37, body extent -7.34,-5.82 7.35,5.38, height 16.1
XTAL500X320X130 [mm]
  rect 2.4x2 smd: 1(0,2) 2(0,-2)
  silkscreen extent -1.6,-2.5 1.6,2.5, body extent -1.6,-2.5 1.6,2.5, height 1.4

## Part data
C1 C24: library part CL21B105KBFNNNE, "1µF/50V 10% X7R Multi-Layer Ceramic Capacitor", Manufacturer="Samsung Electro-Mechanics", CRN=12041, PartNumber=CL21B105KBFNNNE
C2 C8 C9: library part CL21B103KBANNNC, "0.01µF/50V 10% X7R Multi-Layer Ceramic Capacitor", Manufacturer="Samsung Electro-Mechanics", CRN=12041, PartNumber=CL21B103KBANNNC
C3 C10 C20 C29: library part UMK325C7106MM-T, "10µF/50V/20% Multilayer Ceramic Chip Capacitor", Manufacturer="Taiyo Yuden", CRN=12041, PartNumber=UMK325C7106MM-T
C4 C5 C6 C7 C11 C12 C15 C21 C23 C26 C28 C30 C31: library part GRM21BR71H104KA01L, "0.1µF/50V/±10% X7R Ceramic Chip Capacitor", Manufacturer="Murata Manufacturing Co., Ltd.", CRN=12041, PartNumber=GRM21BR71H104KA01L
C13: library part UMK212BB7225KG-T, "2.2µF/50V/10% Multilayer Ceramic Chip Capacitor", Manufacturer="Taiyo Yuden", CRN=12041, PartNumber=UMK212BB7225KG-T
C14 C18: library part CL21C240JBANNNC, "24pF/50V 5% C0G Multi-Layer Ceramic Capacitor", Manufacturer="Samsung Electro-Mechanics", CRN=12041, PartNumber=CL21C240JBANNNC
C16 C17: library part 08051A100KAT2A, "10pF 100V NP0 ±10% Ceramic Capacitor", Manufacturer="AVX Corporation", CRN=12041, PartNumber=08051A100KAT2A
C19: library part EEE-1EA101XP, "100µF/25V/20% Aluminum Electrolytic Capacitor", Manufacturer="Panasonic Corporation of North America", CRN=12041, PartNumber=EEE-1EA101XP
C22: library part EEF-SE0J181R, "180µF/6.3V/20% Low ESR Polymer Aluminum Capacitor (SP-CAP)", Manufacturer="Panasonic Corporation of North America", CRN=12041, PartNumber=EEF-SE0J181R
C25: library part GRM21AR72E152KW01D, "1500pF/250V/±10% X7R Ceramic Chip Capacitor", Manufacturer="Murata Manufacturing Co., Ltd.", CRN=12041, PartNumber=GRM21AR72E152KW01D
C27: library part C0805C472K5RACTU, "4700pF/50V/10% Ceramic Capacitor", Manufacturer="Kemet Electronics Corporation", CRN=12041, PartNumber=C0805C472K5RACTU
CN1: ".050\"[1.27mm] Contact Centers, Male Header", Manufacturer="Sullins Connector Solutions, Inc.", CRN=12041, PartNumber=GRPB052VWVN-RC
CN2: "Connector Receptacle USB Type B 4 Position Through Hole, Vertical", Manufacturer="Wurth Elektronik GmbH & Co. KG", CRN=12041, PartNumber=61400413321
CN3: "Mini-Fit Jr. Header, Dual Row, Vertical, with Snap-in Plastic Peg PCB Lock, 2 Circuits, PA Polyamide Nylon 6/6 94V-2, 0.76µm Gold (Au) Plating", Manufacturer="Molex Inc.", CRN=12041, PartNumber=39-29-9029
CN4: "6 Circuit, Micro MATE-N-LOK 3 mm Vertical Connector", Manufacturer="Tyco Electronics Corporation", CRN=12041, PartNumber=3-794682-6
F1: library part 0468003.NR, "1 A, 32 V, Slo-Blo, 468 Series Surface Mount Fuse", Manufacturer="Littelfuse, Inc.", CRN=12041, PartNumber=0468003.NR
L1 L2: "Multilayer SMD Ferrite", Manufacturer="Wurth Elektronik GmbH & Co. KG", CRN=12041, PartNumber=742792093
L3: "Multilayer SMD Ferrite Bead, 3A, 1.3k @ 100 MHz", Manufacturer="Taiyo Yuden", CRN=12041, PartNumber=FBMH4532HM132-T
L4: library part SRU1038-150Y, "15µH Shielded SMD Power Inductor", Manufacturer="Bourns, Inc.", CRN=12041, PartNumber=SRU1038-150Y
LED1: "Micro LED, 597 Series, Red, SMD LED", Manufacturer="Dialight Corporation", CRN=12041, PartNumber=597-3121-207F
Q1: "25V, 31 A, N-Channel Power MOSFET", Manufacturer="Texas Instruments, Inc.", CRN=12041, PartNumber=CSD16321Q5
R1: library part ERJ-6ENF1004V, "1M, 1%, 0.125W Precision Thick Film Chip Resistor", Manufacturer="Panasonic Corporation of North America", CRN=12041, PartNumber=ERJ-6ENF1004V
R2 R7 R8 R9 R10 R12 R13 R17: library part ERJ-8GEY0R00V, "0, 5%, 0.25W Thick Film Chip Resistor", Manufacturer="Panasonic Corporation of North America", CRN=12041, PartNumber=ERJ-8GEY0R00V
R3 R15: library part DNP_RESC2012X60N, "2012 Chip Resistor", Manufacturer="Confederation College", PartNumber=-, CRN=12041
R4 R5 R6 R11: library part ERJ-6ENF1002V, "10k, 1%, 0.125W Precision Thick Film Chip Resistor", Manufacturer="Panasonic Corporation of North America", CRN=12041, PartNumber=ERJ-6ENF1002V
R14: library part ERJ-6GEYJ4R7V, "4.7, ±5%, 0.125W Thick Film Chip Resistor", Manufacturer="Panasonic Corporation of North America", CRN=12041, PartNumber=ERJ-6GEYJ4R7V
R16: library part ERJ-6ENF1100V, "110, 1%, 0.125W Precision Thick Film Chip Resistor", Manufacturer="Panasonic Corporation of North America", CRN=12041, PartNumber=ERJ-6ENF1100V
R18: library part ERJ-6ENF1501V, "1.5k, 1%, 0.125W Precision Thick Film Chip Resistor", Manufacturer="Panasonic Corporation of North America", CRN=12041, PartNumber=ERJ-6ENF1501V
S1: "KSC Series Sealed Tact Switch for SMT", Manufacturer="C&K Components", CRN=12041, PartNumber=KSC241JLFS
TP1 TP2 TP3 TP4 TP5 TP6 TP7 TP8 TP9 TP10 TP11 TP12 TP13 TP14 TP15 TP16 TP17 TP18 TP19 TP20 TP21 TP22 TP23: "Test Point", Manufacturer="Confederation College", PartNumber=-, CRN=12041
U1: "250 mA, 3.3V Low Dropout Voltage Regulator", Manufacturer="Texas Instruments, Inc.", CRN=12041, PartNumber=TPS73233DBVT
U2: "Tiva TM4C123GH6PM Microcontroller", Manufacturer="Texas Instruments, Inc.", CRN=12041, PartNumber=TM4C123GH6PMI
U3: "TVS Diode Array - Low Capacitance ESD Protection", Manufacturer="Littelfuse, Inc.", CRN=12041, PartNumber=SP3003-02JTG
U4: "3.3 V EconoReset with Pushbutton", Manufacturer="Maxim Integrated", CRN=12041, PartNumber=DS1818R-10+T&R
U5: "5V, 4.5V to 20V Input, 3A Output Synchronous PWM Switcher with Integrated FET (SWIFT)", Manufacturer="Texas Instruments, Inc.", CRN=12041, PartNumber=TPS54357PWP
U6: "1Mbps Dual Channel Digital Isolator with isoPower Integrated DC-to-DC Converter, 2.5 kV", Manufacturer="Analog Devices, Inc.", CRN=12041, PartNumber=ADUM5201ARWZ
U7: "3.3 V, Full Duplex, 840 uA, 20 Mbps, EIA RS-485 Transceiver", Manufacturer="Analog Devices, Inc.", CRN=12041, PartNumber=ADM3491ARZ
Y1: library part ABM3-16.000MHZ-B2-T, "16 MHz Miniature Ceramic SMD Crystal", Manufacturer="Abracon Corporation", CRN=12041, PartNumber=ABM3-16.000MHZ-B2-T
Y2: library part AB26TRB-32.768KHZ-T, "32.768 kHz Radial Can Crystal", Manufacturer="Abracon Corporation", CRN=12041, PartNumber=AB26TRB-32.768KHZ-T

## Free pads (board coordinates)
  round 8 hole 4.5: 0(25,25) 0(25,75) 0(75,25) 0(75,75)

## Via types
v1: diameter 0.7, hole 0.35, Top Layer to Bottom Layer, tented both sides, 102 vias
v2: diameter 0.7, hole 0.4, Top Layer to Bottom Layer, tented both sides, 12 vias

## Nets (pads, with @x,y where several pads share a name; then routed paths per layer and width w, separated by ;. In a path a pad name is that pad's centre, name@x,y a point inside that pad or via, vN(x,y) a via of type N, cw(c..) or ccw(c..) an arc to the next point about the centre after c; other vN are vias at no path point)
+3.3V: C3.1 C15.1 C31.1 CN1.1 L1.2 R2.2 R4.2 R5.2 R6.2 R11.2 R18.2 U4.2 U6.1 U6.6 U6.7 | length 134.8
  Top Layer w0.25: v1(31.064,32.08) 31.09,32.055 35.433,32.055 36.627,30.861 36.627,30.582 36.995,30.95 U4.2 38.2,33.6 v1(37.6,34.2) ; C31.1 33.305,74.175 34.238,75.108 v1(34.468,75.108) ; v1(34.341,67.513) 36.862,67.513 R2.2 ; v1(36.627,27.28) 36.576,27.33 36.576,30.912 ; R2.2@42.075,62.2 R2.2 ; R18.2@55.359,38.698 R18.2@55.54,38.698 ; R18.2 R18.2@55.54,38.698 ; v1(58.369,41.631) 57.201,42.799 54.813,42.799 53.67,41.656 53.67,40.567 R18.2@55.54,38.698 ; v1(63.195,28.346) 65.075,30.226 65.075,38.005 L1.2 65.035,39.08 v1(65.176,38.938) ; 36.576,30.912 36.576,30.582 36.576,30.912
  Bottom Layer w0.25: v1(31.064,32.08) 31.15,31.994 R5.2 R4.2 ; v1(34.468,75.108) 34.306,75.108 34.255,75.159 34.112,75.159 34.096,75.175 U6.7 U6.6 30.903,73.905 29.337,72.339 29.337,69.24 31.039,67.539 32.234,67.539 U6.1 34.299,67.555 v1(34.341,67.513) 34.341,57.76 30.404,53.823 30.404,39.121 33.207,36.318 C15.1 35.325,34.2 v1(37.6,34.2) ; v1(36.627,27.28) 37.066,27.28 37.786,28 R6.2 ; C3.1 C3.1@58.323,46.325 ; 58.369,41.275 v1(58.369,41.631) ; 59.868,41.072 59.969,41.173 ; R11.2 63.195,27.045 v1(63.195,28.346)
  Bottom Layer w0.6: C3.1@58.323,46.325 59.969,44.679 59.969,41.173 ; 58.369,41.275 59.741,39.903 59.741,36.83 60.35,36.22 65.253,36.22 66.116,37.084 66.116,37.998 v1(65.176,38.938) ; v1(58.369,41.631) 59.309,41.631 59.868,41.072
+5.0V: C1.1 C22.1 C23.1 C26.1 L4.2 R3.2 U1.1 U1.3 U5.9 | length 60.1
  Top Layer w0.381: U1.1 U1.1@59.625,38.975
  Top Layer w0.6: v1(47.868,35.989) 47.868,38.039 51.748,41.918 v1(51.748,42.289) ; U1.3 57.751,37.05 57.709,37.008 57.099,37.617 57.099,39.7 57.175,39.7 55.4,41.476 v1(55.4,42) 56.575,42 U1.1 ; U1.1@59.625,38.975 59.625,41.997 60.909,43.282 62.84,43.282 65.227,45.669 65.227,47.727 65.811,48.311 67.462,48.311 68.072,47.701 68.072,46.103 C26.1 69.175,44.312 70.434,43.053 71.958,43.053 71.984,43.078 71.984,50.191 U5.9
  Bottom Layer w0.381: C1.1 C1.1@53.325,42.1
  Bottom Layer w0.6: v1(47.868,35.989) 49.965,35.989 50.804,35.15 R3.2 ; v1(51.748,42.289) 51.912,42.125 C1.1 ; C1.1@53.325,42.1 53.425,42 v1(55.4,42)
  other v2: 69.621,62.23
+12.0V: F1.2 L3.1
GND: C1.2 C2.2 C3.2 C4.1 C5.1 C6.1 C7.1 C8.1 C9.1 C10.1 C11.1 C12.1 C13.2 C15.2 C16.2 C17.2 C19.2 C20.2 C22.2 C23.2 C24.2 C25.2 C26.2 C31.2 CN1.3 CN1.5 CN1.9 CN2.4 CN4.6 Q1.S R9.1 R12.1 R13.1 R17.2 S1.1 TP23.1 U1.2 U2.3 U2.12 U2.27 U2.39 U2.55 U3.2 U4.3 U5.10 U5.11 U5.17 U6.2 U6.5 U6.8 | length 237.9
  Top Layer w0.25: U2.27 31.848,53.75 32.969,52.629 ; R12.1 29.72,41.425 30.353,40.792 33.807,40.792 34.849,41.834 C17.2@39.111,41.834 ; v1(30.582,58.115) 30.632,58.166 30.632,59.131 31.25,59.749 U2.12 31.242,60.733 31.267,60.758 v1(31.267,64.084) ; v1(31.394,52.934) 31.928,52.934 32.601,52.261 ; v1(31.598,72.644) 31.572,72.644 v1(31.572,76.454) 32.371,76.454 C31.2 45.45,75.825 R17.2 45.247,76.378 42.977,76.378 42.977,78.308 58.192,78.308 CN4.6 ; U2.39 32.233,49.292 32.233,51.892 32.601,52.261 ; v1(33.545,59.453) 35.716,59.453 35.75,59.487 ; v1(34.239,68.834) 34.29,68.885 v1(34.29,72.009) ; v1(35.1,31.1) 35.1,30.7 U4.3 ; U2.3 35.75,59.487 ; U2.55 43.819,54.25 46.482,51.587 v1(46.482,50.038) ; C17.2@39.111,41.839 C17.2 40.544,41.839 41.681,42.977 41.681,43.713 42.088,44.12 42.088,45.593 C16.2@41.015,46.666 ; v1(48.412,50.114) 50.314,50.114 R9.1 ; CN2.4 52.067,25.4 55.488,21.979 61.179,21.979 61.2,22 S1.1@66.8,22 ; C22.2 60.733,58.242 v1(61.874,58.242) 65.811,58.242 68.6,55.454 U5.17 ; U1.2 60.149,38 63.849,41.7 R13.1 ; C26.2 C24.2 ; 32.601,52.261 32.969,52.629 ; 32.969,52.629 35.75,55.41 35.75,59.487
  Top Layer w0.6: v1(58.344,37.948) 59.573,37.948 U1.2
  Bottom Layer w0.25: C10.1 31.045,64.225 31.313,63.957 31.344,63.957 31.369,63.983 v1(31.267,64.084) ; v1(30.582,58.115) 32.131,58.115 33.553,59.538 33.553,59.461 v1(33.545,59.453) ; v1(31.394,52.934) 31.394,52.431 C7.1 33.5,51.825 ; U6.2 34.23,68.825 v1(34.239,68.834) ; U6.5 32.25,71.89 32.369,72.009 v1(34.29,72.009) ; C4.1@35.01,51.825 33.5,51.825 ; v1(35.1,31.1) C15.2 ; C13.2 40.7,46.925 39.6,46.925 38.837,47.688 38.837,50.012 C8.1 40.605,50.175 41.25,49.53 43.688,49.53 44.196,50.038 v1(46.482,50.038) ; C9.1@42.164,52.172 42.511,51.825 42.986,51.825 43.917,52.756 43.917,54.864 42.956,55.825 C5.1 C6.1 C11.1 33.829,55.825 32.614,54.61 32.614,53.518 33.5,52.631 33.5,51.825 ; v1(48.412,50.114) 48.362,50.114 48.285,50.038 48.285,46.977 C12.1 48.247,45.441 48.997,45.441 50.262,44.175 C2.2 ; C3.2@57.5,44.175 C3.2 ; v1(61.874,58.242) 62.933,58.242 C23.2
  Bottom Layer w0.6: U3.2 45.974,37.151 45.974,37.795 47.193,39.014 51.839,39.014 C1.2 56.625,40.475 58.344,38.756 v1(58.344,37.948) ; C2.2 C3.2@57.5,44.175
  other v1: 41.453,46.761
  other v2: 72.974,51.41 67.97,52.273 69.266,52.299 69.215,53.442 68.021,53.543 54.762,53.848
IGND: C28.2 C29.2 C30.2 R17.1 U6.9 U6.11 U6.15 U7.3 U7.6 U7.7 | length 34.3
  Top Layer w0.25: v1(39.751,73.914) 38.589,73.914 C29.2 39.5,72.325 C28.2 ; v1(44.374,77.368) 46.232,77.368 47.6,76 R17.1 47.2,74.825 C30.2
  Bottom Layer w0.25: U6.11 41.741,73.914 v1(39.751,73.914) ; U6.9 40.733,76.445 39.802,75.514 39.802,73.965 v1(39.751,73.914) ; U7.3 44.238,70.73 43.485,69.977 43.256,69.977 42.104,68.825 U6.15 41.734,68.809 41.453,68.809 39.751,70.51 v1(39.751,73.914) ; v1(44.348,74.32) 44.348,74.27 44.275,74.196 U7.6 ; v1(44.374,77.368) 44.374,76.11 44.399,76.084 44.2,75.885 U7.7 U7.6 ; U7.6 44.275,74.32 U7.6
IVCC: C28.1 C29.1 C30.1 U6.10 U6.16 U7.4 U7.13 U7.14 | length 21.9
  Top Layer w0.25: C29.1 39.5,69.675 C28.1 v1(40,67.6) ; v1(45.8,71.9) 46.725,70.975 C30.1
  Bottom Layer w0.25: v1(40,67.6) 41.705,67.6 U6.16 ; U6.10 42.148,75.175 43.129,74.193 43.129,72.542 43.672,72 U7.4 44.375,71.9 v1(45.8,71.9) 48.24,69.46 U7.13 U7.14
NetC2_1: C2.1 U1.4 | length 18.9
  Top Layer w0.25: v1(60.675,37.135) 62.29,37.135 U1.4
  Bottom Layer w0.25: C2.1 C2.1@55,45.932
  Bottom Layer w0.6: C2.1 55,46.491 56.49,47.981 59.284,47.981 60.706,46.558 60.706,37.166 v1(60.675,37.135)
NetC14_1: C14.1 U2.34 Y2.2 | length 30.1
  Top Layer w0.25: C14.1 25.5,37.441 27.254,35.687 ; v1(26.111,47.066) 26.34,46.838 28.143,46.838 28.143,46.903 v1(28.166,46.925) ; 27.305,35.738 28.905,35.738 29.65,36.483 ; v1(28.219,48.057) 27.875,48.057 27.661,48.271 27.661,49.86 28.423,50.622 29.489,50.622 29.75,50.362 U2.34 ; 28.346,39.479 Y2.2
  Top Layer w0.6: 27.254,35.687 27.305,35.738 ; 28.346,39.479 v1(28.346,39.878) ; 29.65,36.483 Y2.2
  Bottom Layer w0.25: v1(26.111,47.066) 26.187,46.99 v1@26.187,46.838 ; v1@26.22,46.838 v1@26.187,46.838 ; v1(28.166,46.925) 28.219,46.979 v1@28.219,47.712 ; v1(28.219,48.057) 28.273,48.003 v1@28.273,47.827 ; v1(28.346,39.878) 26.187,42.037 v1@26.187,46.838
NetC14_2: C14.2 C18.1 R12.2 U2.35 | length 31.2
  Top Layer w0.25: v1(25.476,44.221) 25.476,44.044 25.502,44.018 25.5,44.017 C14.2 ; v1(27.33,47.574) 27.33,47.828 27.28,47.879 27.28,50.038 28.245,51.003 29.997,51.003 30.25,50.751 U2.35 ; v1(28.067,42.774) 28.067,43.055 28.5,43.488 R12.2@28.5,44.1 ; R12.2 R12.2@28.5,44.1 ; C18.1 29.475,44 28.6,44 R12.2@28.5,44.1
  Bottom Layer w0.25: v1(25.476,44.221) 25.476,41.656 26.111,41.021 28.108,39.024 28.813,39.024 ; v1(27.33,47.574) 27.305,47.574 27.305,43.665 27.991,42.979 28.067,42.903 v1(28.067,42.774) 28.067,42.926 28.026,42.967 29.159,41.834 29.159,39.37 28.813,39.024
NetC16_1: C16.1 R10.1 Y1.2 | length 11.3
  Top Layer w0.25: R10.1 40.72,43.71 40.894,43.536 v1@40.945,43.485 ; v1@40.869,43.383 C16.1@40.869,44.743 ; v1(43.485,39.98) 43.663,40.157 Y1.2
  Bottom Layer w0.25: v1@40.945,43.485 43.485,40.945 v1(43.485,39.98)
  other v1: 40.919,43.332
NetC17_1: C17.1 U2.40 Y1.1 | length 30.6
  Top Layer w0.25: U2.40 32.75,48.454 33.807,47.396 33.807,42.52 36.068,42.52 36.754,43.205 36.754,47.371 37.059,47.676 41.834,47.676 41.834,47.701 43.314,46.221 Y1.1 43.663,44.983 42.215,43.536 42.215,41.681 40.615,40.081 39.786,40.081 C17.1
NetC18_2: C18.2 U2.36 Y2.1 | length 17.9
  Top Layer w0.25: Y2.1 27.15,44.879 27.661,45.39 30.734,45.39 30.759,45.415 31.5,44.675 ; U2.36 30.75,47.736 v1(31.42,47.066) ; C18.2 31.5,44.675 ; v1(31.877,45.364) 31.877,45.052 31.5,44.675
  Bottom Layer w0.25: v1(31.42,47.066) 31.877,46.609 v1(31.877,45.364)
NetC19_1: C19.1 C20.1 L3.2 U5.1 U5.2
  other v2: 57.15,50.521 59.817,54.534
NetC21_1: C21.1 U5.16 | length 6.7
  Top Layer w0.25: v1(69.088,58.166) 69.088,57.175 71.088,55.175 U5.16
  Bottom Layer w0.25: v1(69.088,58.166) 69.447,58.525 C21.1
NetC21_2: C21.2 L4.1 Q1.D R14.2 U5.14 U5.15 | length 3.2
  Bottom Layer w0.25: R14.2 75.35,57.746 Q1.D@75.552,57.543
  other v2: 71.45,56.896 74.244,57.988
NetC24_1: C24.1 U5.12 | length 13.9
  Top Layer w0.25: C24.1 69.175,47.614 70.079,46.711 v1(70.079,46.507) ; v1(70.18,54.915) 70.18,52.756 70.231,52.705 70.361,52.575 U5.12
  Bottom Layer w0.25: v1(70.079,46.507) 70.18,46.609 70.18,52.384 v1(70.18,54.915)
NetC25_1: C25.1 R14.1 | length 2
  Bottom Layer w0.25: C25.1 77.025,60.725 R14.1
NetC27_1: C27.1 R16.1 | length 3.2
  Top Layer w0.25: C27.1 49.175,67 R16.1
NetC27_2: C27.2 CN4.2 R15.1 U7.11 | length 29.1
  Top Layer w0.25: C27.2 50.334,68.825 ; R15.1 51.975,68.825 50.334,68.825 ; CN4.2 65.541,74.041 65.532,74.041 65.354,73.863 65.354,71.831 63.17,69.647 55.448,69.647 52.984,72.111 52.019,72.111 v1(51.943,72.034) 51.943,70.434 50.334,68.825
  Bottom Layer w0.25: U7.11 51.909,72 v1(51.943,72.034)
NetCN1_7: CN1.7 TP12.1 | length 4.7
  Top Layer w0.25: CN1.7 37.27,22.01 38.096,21.184 39.645,21.184 40.432,21.97 TP12.1
  Top Layer w0.6: CN1.7@37.107,22.202 CN1.7 ; TP12.1@40.415,22.279 TP12.1
NetCN2_0: CN2.0 R9.2 | length 41
  Top Layer w0.25: CN2.0@43.98,25.9 45.18,27.1 ; R9.2 53.53,49.648 53.53,45.072 45.745,37.287 45.745,27.665 45.18,27.1 ; CN2.0@56.02,25.9 53.4,25.9 52.2,27.1 45.2,27.1 45.2,27.12 45.18,27.1
NetCN2_1: CN2.1 L2.2 | length 7.3
  Bottom Layer w0.25: L2.2 51.25,32.67 CN2.1
NetCN2_2: CN2.2 U2.43 U3.4 | length 35.3
  Top Layer w0.25: U2.43 34.25,48.071 34.498,47.823 34.498,47.737 34.534,47.737 34.6,47.671 34.6,46.101 v1(34.872,45.829) ; v1(38.405,39.091) 41.12,39.091 v1(41.136,39.106)
  Bottom Layer w0.2: U3.4 48.75,32.775 CN2.2
  Bottom Layer w0.25: v1(34.872,45.829) 35.727,46.685 38.024,46.685 38.735,45.974 38.735,40.361 38.405,40.03 v1(38.405,39.091) ; v1(41.136,39.106) 41.605,38.637 41.605,34.925 41.681,34.849 44.145,34.849 44.933,35.636 45.999,35.636 46.65,34.986 U3.4
NetCN2_3: CN2.3 U2.44 U3.5 | length 35.3
  Top Layer w0.2: U2.44@34.874,49.151 U2.44 34.75,48.511 34.925,48.336 34.925,46.914 35.789,46.05 35.992,45.847 v1(35.992,45.593)
  Bottom Layer w0.2: v1(35.992,45.593) 35.712,45.593 35.357,45.237 35.357,38.151 35.128,37.922 36.119,37.922 39.599,34.442 44.917,34.442 U3.5 47.6,32.625 47.6,27.2 CN2.3@48.75,26.05
  Bottom Layer w0.25: CN2.3 CN2.3@48.75,26.05
NetCN3_1: CN3.1 F1.1
NetCN3_2: CN3.2 R13.2
  other v2: 62.025,41.7
NetCN4_1: CN4.1 R15.2 R16.2 U7.12 | length 22.2
  Top Layer w0.25: v1(53.442,70.637) 53.85,70.229 R15.2 ; R16.2 R15.2 ; CN4.1 63.5,69 R15.2
  Bottom Layer w0.25: U7.12 53.349,70.73 v1(53.442,70.637)
NetCN4_3: CN4.3 U7.9 | length 17.7
  Top Layer w0.25: v1(50.902,74.498) 51.613,74.498 55.931,70.18 62.865,70.18 64,71.315 CN4.3
  Bottom Layer w0.25: U7.9 49.767,74.498 v1(50.902,74.498)
NetCN4_4: CN4.4 U7.10 | length 17.5
  Bottom Layer w0.25: U7.10 53.356,73.27 57.531,77.445 58.776,77.445 63.246,77.445 64,76.691 CN4.4
NetL1_1: L1.1 U1.5 | length 2.7
  Top Layer w0.25: U1.5 62.375,38.545 L1.1
NetL2_1: L2.1 R3.1 R7.2 U3.3 | length 17.3
  Bottom Layer w0.25: L2.1@49.23,36.85 R3.1
  Bottom Layer w0.6: R7.2 47.451,42.828 44.602,39.98 44.602,36.601 45.034,36.17 46.279,36.17 46.699,36.589 46.699,37.08 L2.1 L2.1@49.23,36.85
NetLED1_1: LED1.1 TP15.1 U2.29 | length 61.3
  Top Layer w0.25: v1(25.095,50.216) 22.098,47.219 22.098,39.141 26.441,34.798 29.439,34.798 32.131,37.49 v1(33.604,37.49) ; U2.29 28.047,52.75 28.833,51.964 v1(28.833,51.916) ; v1(46.558,31.852) 49.2,31.852 50.6,33.252 LED1.1
  Top Layer w0.6: LED1.1 51.294,38.694 v1(51.294,40.146)
  Bottom Layer w0.25: v1(25.095,50.216) 27.407,50.216 28.753,51.562 28.753,51.836 v1(28.833,51.916) ; v1(33.604,37.49) 35.89,37.49 41.529,31.852 v1(46.558,31.852)
  Bottom Layer w0.6: TP15.1 51,40.44 v1(51.294,40.146)
NetLED1_2: LED1.2 R18.1 | length 2.7
  Top Layer w0.6: LED1.2 54.402,36.998 R18.1
NetQ1_G: Q1.G U5.13 | length 3.2
  Top Layer w0.25: U5.13 73.089,53.225 v1(74.257,52.057)
NetR1_1: R1.1 U2.32 | length 7.2
  Top Layer w0.25: R1.1 23.05,47.025 U2.32
NetR7_1: R7.1 U2.46 | length 26.6
  Top Layer w0.25: U2.46 35.75,50.304 36.068,50.622 36.652,50.622 39.081,48.194 43.022,48.194 v1(43.593,48.765) ; v1(47.32,49.2) 48.844,47.676 49.454,47.676 50.952,46.177 v1(50.952,43.459)
  Bottom Layer w0.25: v1(43.593,48.765) 43.593,48.876 43.917,49.2 v1(47.32,49.2) ; R7.1 48.971,40.945 50.521,42.494 50.521,43.663 50.724,43.459 v1(50.952,43.459)
NetR8_1: R8.1 U2.38 U4.1 | length 30.5
  Top Layer w0.25: U2.38 31.75,48.59 31.909,48.431 31.909,48.406 32.041,48.274 32.371,48.274 33.299,47.346 33.299,41.834 v1(33.02,41.554) ; v1(37.262,29.947) 37.303,29.947 37.465,29.785 U4.1 U4.1@38.227,29.077 ; v1(39.7,29.794) 40.052,29.794 41.199,28.648 R8.1
  Bottom Layer w0.25: v1(33.02,41.554) 32.944,41.478 32.944,37.77 32.918,37.795 32.918,37.16 34.646,35.433 37.389,35.433 38.557,34.265 38.557,30.328 39.065,29.82 ; v1(37.262,29.947) 37.465,29.947 37.592,29.82 39.065,29.82 ; v1(39.7,29.794) 39.091,29.794 39.065,29.82
NetR10_2: R10.2 U2.41 | length 14
  Top Layer w0.25: U2.41 33.25,48.513 34.188,47.574 34.188,43.383 34.544,43.028 35.89,43.028 36.373,43.51 36.373,44.348 36.322,44.399 36.119,44.602 36.043,44.526 v1(36.043,44.399) ; v1(37.922,44.885) 37.922,46.384 R10.2
  Bottom Layer w0.25: v1(36.043,44.399) 37.16,44.399 37.567,44.399 37.821,44.653 37.922,44.755 v1(37.922,44.885)
NetR11_1: R11.1 S1.2 U2.28 | length 75.9
  Top Layer w0.25: U2.28 28.157,53.25 28.171,53.264 28.222,53.213 29.39,53.213 29.695,52.908 29.644,52.959 29.693,52.91 v1(29.693,52.756) ; v1(61.316,24.816) 61.2,24.931 61.2,26 61.241,25.959 66.759,25.959 66.8,26 66.766,26.034 v1(66.766,26.967)
  Bottom Layer w0.25: v1(29.693,52.756) 29.693,26.01 29.464,25.781 29.896,25.349 29.87,25.324 30.048,25.146 29.845,24.943 30.048,24.74 29.947,24.638 30.074,24.511 29.997,24.435 33.401,21.031 57.531,21.031 v1(61.316,24.816) ; R11.1 66.733,27 v1(66.766,26.967)
NetTP1_1: TP1.1 U2.33 | length 2.2
  Top Layer w0.25: U2.33 29.25,47.585 TP1.1 ; TP1.1@29.261,47.803 TP1.1@29.642,47.422
NetTP2_1: TP2.1 U2.15 | length 4.2
  Top Layer w0.25: TP2.1 27.813,62.103 29.21,62.103 29.75,61.563 U2.15
NetTP3_1: TP3.1 U2.16 | length 6
  Top Layer w0.25: TP3.1 25.07,61.519 25.864,60.725 U2.16
NetTP5_1: TP5.1 U2.23 | length 2.8
  Top Layer w0.25: TP5.1 25,56.991 26.241,55.75 U2.23
NetTP6_1: TP6.1 U2.24 | length 2.3
  Top Layer w0.25: TP6.1 27.255,55.27 U2.24
NetTP7_1: TP7.1 U2.10 | length 3.9
  Top Layer w0.25: U2.10 32.25,62.374 32.842,62.967 TP7.1
NetTP8_1: TP8.1 U2.53 | length 5.4
  Top Layer w0.25: U2.53 43.75,53.25 TP8.1
NetTP9_1: TP9.1 U2.13 | length 2.3
  Top Layer w0.25: TP9.1 30.505,62.484 30.734,62.255 30.734,60.741 U2.13
NetTP10_1: TP10.1 U2.14 | length 3.1
  Top Layer w0.25: TP10.1 29.134,62.967 30.251,61.849 30.251,60.726 U2.14
NetTP11_1: TP11.1 U2.45 | length 2.7
  Top Layer w0.25: U2.45 35.25,47.579 TP11.1
NetTP13_1: TP13.1 U2.64 | length 5.4
  Top Layer w0.25: U2.64 43.75,58.75 TP13.1
NetTP14_1: TP14.1 U2.63 | length 5.8
  Top Layer w0.25: U2.63 42.75,58.25 TP14.1
NetTP16_1: TP16.1 U2.31 | length 2.4
  Top Layer w0.25: TP16.1 26.005,51.765 26.02,51.75 U2.31
NetTP17_1: TP17.1 U2.5 | length 2.8
  Top Layer w0.25: U2.5 34.75,61.75 TP17.1
NetTP18_1: TP18.1 U5.3 | length 7.8
  Top Layer w0.25: TP18.1 65.584,57.2 67.335,55.448 67.335,54.635 66.599,53.899 65.674,53.899 U5.3
NetTP19_1: TP19.1 U5.5 | length 7.3
  Top Layer w0.25: v1(61.798,55.88) 62.89,55.88 62.967,55.956 TP19.1 ; v1(63.932,52.934) 64.29,52.575 U5.5
  Bottom Layer w0.25: v1(61.798,55.88) 61.874,55.956 64.008,53.823 64.008,53.01 v1(63.932,52.934)
NetTP20_1: TP20.1 U5.6 | length 3.5
  Top Layer w0.25: TP20.1 62.865,52.959 63.906,51.918 63.914,51.925 U5.6
NetTP21_1: TP21.1 U5.7 | length 2.8
  Top Layer w0.25: TP21.1 65.575,51.2 U5.7
NetTP22_1: TP22.1 U5.8 | length 3.4
  Top Layer w0.25: TP22.1 64.296,50.625 U5.8
NetU6_13: U6.13 U7.2 | length 9.2
  Top Layer w0.25: v1@41.631,71.222 v1(41.808,71.399) 41.808,70.737 43.155,69.391 v1(43.155,66.573)
  Bottom Layer w0.25: U6.13 41.774,71.365 v1(41.808,71.399) ; v1(43.155,66.573) 43.155,68.555 44.06,69.46 U7.2
NetU6_14: U6.14 U7.5 | length 7.4
  Top Layer w0.25: v1(43,70.604) 45.573,73.177 45.624,73.228 v1(45.796,73.228)
  Bottom Layer w0.25: U6.14@42.206,70.095 U6.14 42.259,70.604 v1(43,70.604) ; U7.5 44.368,73.177 44.418,73.228 v1(45.796,73.228)
PWRGOOD: U2.30 U5.4 | length 63
  Top Layer w0.25: v1(23.226,63.368) 25.314,65.456 v1(35.433,65.456) ; v1(23.597,53.01) 25.095,53.01 25.855,52.25 U2.30 ; v1(61.798,53.857) 61.798,53.975 64.135,53.975 64.885,53.225 U5.4
  Bottom Layer w0.25: v1(23.226,63.368) 23.226,53.38 v1(23.597,53.01) ; v1(35.433,65.456) 49.987,65.456 61.586,53.857 v1(61.798,53.857)
RST: CN1.10 R8.2 | length 11.5
  Top Layer w0.25: CN1.10 38.875,23.635 43.104,27.864 43.104,30.556 42.285,31.375 R8.2@41,31.375
SLRXD: U2.17 U6.4 | length 24
  Top Layer w0.25: U2.17 22.86,58.75 21.895,59.715 21.895,64.846 28.448,71.399 v1(30.15,71.399)
  Bottom Layer w0.25: v1(30.15,71.399) 30.184,71.365 U6.4
SLTXD: U2.18 U6.3 | length 25
  Top Layer w0.25: U2.18 28.176,58.25 28.55,58.623 28.55,59.08 28.219,59.411 23.089,59.411 22.962,59.538 22.479,60.02 22.479,64.567 23.398,65.486 27.991,70.079 v1(30.175,70.079)
  Bottom Layer w0.25: v1(30.175,70.079) 30.192,70.095 U6.3
TCK: CN1.4 R5.1 U2.52 | length 53.4
  Top Layer w0.25: v1(32.334,36.22) 42.367,36.22 50.343,44.196 50.343,45.187 42.799,52.73 38.745,52.73 U2.52
  Bottom Layer w0.25: v1(32.334,36.22) 32.512,36.22 32.715,36.017 33.985,34.747 33.96,34.722 33.96,30.861 34.73,30.091 34.73,29.12 ; R5.1 34.73,29.12 ; CN1.4 34.73,29.12
TDI: CN1.8 U2.50 | length 45.8
  Top Layer w0.25: CN1.8 40.432,26.797 41.326,26.797 42.647,28.118 42.647,30.074 42.215,30.505 39.878,30.505 39.472,30.912 39.472,33.63 41.427,35.585 42.901,35.585 42.926,35.611 v1(43.002,35.611) ; U2.50 38.766,51.791 42.012,51.791 48.717,45.085 48.717,43.663 44.12,39.065 v1(42.494,39.065)
  Bottom Layer w0.25: v1(42.494,39.065) 42.799,38.76 42.926,38.633 43.002,38.557 v1(43.002,35.611)
TDO: CN1.6 R6.1 U2.49 | length 35.3
  Top Layer w0.25: CN1.6 v1@39.04,26.675 ; v1(37.313,51.537) 37.313,51.638 37.236,51.714 37.44,51.511 37.465,51.486 37.701,51.25 U2.49 ; v1(39.091,26.518) 38.964,26.645 38.964,35.23 v1(39.903,35.23)
  Bottom Layer w0.25: v1(37.313,51.537) 37.313,48.819 37.186,48.692 37.236,48.641 37.44,48.438 37.44,47.93 40.03,45.339 39.903,45.212 v1(39.903,35.23) ; v1(39.091,26.518) 39.091,26.772 39.85,27.531 R6.1
TMS: CN1.2 R4.1 U2.51 | length 51.1
  Top Layer w0.25: v1(30.836,37.516) 31.547,38.227 43.84,38.227 49.428,43.815 49.428,45.11 42.289,52.25 U2.51
  Bottom Layer w0.25: v1(30.836,37.516) 30.836,36.703 32.004,35.535 32.004,30.251 32.85,29.405 R4.1 33.46,28.39 CN1.2
VDD: C4.2 C5.2 C6.2 C7.2 C8.2 C9.2 C10.2 R1.2 R2.1 U2.2 U2.11 U2.26 U2.37 U2.42 U2.54 | length 81.4
  Top Layer w0.25: R1.2 25.145,46.195 31.87,46.195 32.487,46.813 v1(32.487,47.142) 31.25,48.379 U2.37 31.25,50.081 31.079,50.252 v1(31.079,50.686) v1@31.079,50.735 ; U2.26 27.296,54.229 29.439,54.229 31.75,56.54 v1(31.75,59.233) ; U2.11 v1(31.75,59.233) ; U2.42 33.757,49.282 33.757,50.864 33.89,50.997 34.023,51.13 33.96,51.067 33.934,51.093 33.821,51.206 33.846,51.181 33.795,51.131 v1(33.795,50.965) ; v1(35.027,57) 35.027,56.794 35.052,56.82 v1(35.052,58.445) ; v1@35.052,57 v1(35.052,58.445) ; v1(36.425,59.479) 36.25,59.654 U2.2 36.25,61.85 36.9,62.5 R2.1@39.425,62.5 ; v1(37.033,56.718) 36.805,56.49 36.805,54.534 37.588,53.75 37.646,53.75 ; v1(37.287,52.781) 37.287,52.705 37.186,52.603 37.186,53.289 37.646,53.75 ; U2.54 37.646,53.75 ; v1(31.75,59.233) 31.902,59.233 32.69,58.445 v1(35.052,58.445)
  Bottom Layer w0.25: C10.2 29.408,61.575 v1(31.75,59.233) ; v1(31.079,50.686) 32,50.686 33.516,50.686 v1(33.795,50.965) ; v1(32.487,47.142) 32.41,47.142 32,47.553 C7.2 35,50.175 36.205,50.175 36.551,50.521 36.551,51.943 37.209,52.601 37.209,52.703 v1(37.287,52.781) 38.044,52.781 C8.2 C6.2 C5.2 40.64,52.815 40.64,51.105 41.57,50.175 C9.2@42,50.175 ; v1(35.027,57) 36.426,57 36.449,57.023 36.754,56.718 v1(37.033,56.718) ; v1(35.052,58.445) 36.085,59.479 v1(36.425,59.479) ; v1(33.795,50.965) 33.871,50.965 33.934,51.029 33.833,50.927 v1(33.795,50.965)
VDDC: C11.2 C12.2 C13.1 TP4.1 U2.25 U2.56 | length 44.8
  Top Layer w0.25: TP4.1 26.013,54.75 U2.25 28.994,54.75 v1(29.515,55.27) ; v1(32.563,56.947) 33.35,56.159 v1(33.35,54.153) ; U2.56 38.034,54.75 37.862,54.922 v1(37.48,54.922) 37.775,55.217 37.775,57.678 37.414,58.039 36.246,58.039 36.246,51.638 38.811,49.073 39.954,49.073 40.183,49.301 40.208,49.301 40.284,49.378 v1(40.411,49.378)
  Bottom Layer w0.25: v1(29.515,55.27) 30.886,55.27 v1(32.563,56.947) ; v1(33.35,54.153) C11.2@34.978,54.153 ; C11.2@34.747,53.922 C11.2@34.978,54.153 ; v1(37.48,54.922) 37.414,54.857 37.414,54.712 36.878,54.175 C11.2 C11.2@34.978,54.153 ; v1(40.411,49.378) 40.386,49.378 40.31,49.301 40.234,49.225 40.411,49.047 40.035,48.671 40.035,48.459 40.418,48.075 C13.1 44.836,44.539 C12.2
pads on no net: CN3.0 CN4.0 CN4.5 U2.1 U2.4 U2.6 U2.7 U2.8 U2.9 U2.19 U2.20 U2.21 U2.22 U2.47 U2.48 U2.57 U2.58 U2.59 U2.60 U2.61 U2.62 U3.1 U6.12 U7.1 U7.8 Y2.0

## Polygon pours and split planes (outlines as drawn)
GND on Ground Plane (split plane): 79.49,20.51 20.51,20.51 20.51,79.49 34.173,79.49 34.173,65.3 34.182,65.251 34.21,65.21 34.251,65.182 34.3,65.173 54.3,65.173 54.349,65.182 54.39,65.21 58.553,69.373 70.6,69.373 70.649,69.382 70.69,69.41 70.718,69.451 70.727,69.5 70.727,72.15 70.727,77.45 70.727,79.49 79.49,79.49
IGND on Ground Plane (split plane): 70.473,77.45 70.473,72.15 70.473,69.627 58.5,69.627 58.451,69.618 58.41,69.59 54.247,65.427 34.427,65.427 34.427,79.49 70.473,79.49
+3.3V on Power Plane (split plane): 34.373,65.4 34.382,65.351 34.41,65.31 34.451,65.282 34.5,65.273 44.673,65.273 44.673,56.5 44.682,56.451 44.71,56.41 44.751,56.382 44.8,56.373 53.473,56.373 53.473,44.7 53.482,44.651 53.51,44.61 64.31,33.81 64.351,33.782 64.4,33.773 79.49,33.773 79.49,20.51 20.51,20.51 20.51,79.49 34.373,79.49
VDD on Power Plane (split plane): 29.373,63.847 29.373,58.9 29.382,58.851 29.41,58.81 29.451,58.782 29.5,58.773 43.273,58.773 43.273,47.527 30.427,47.527 30.427,53.073 37,53.073 37.049,53.082 37.09,53.11 37.118,53.151 37.127,53.2 37.127,58.6 37.118,58.649 37.09,58.69 37.049,58.718 37,58.727 29.5,58.727 29.451,58.718 29.41,58.69 29.382,58.649 29.373,58.6 29.373,56.127 24.627,56.127 24.627,63.873 29.347,63.873
+12.0V on Power Plane (split plane): 79.49,34.027 64.453,34.027 53.727,44.753 53.727,56.373 79.49,56.373
IVCC on Power Plane (split plane): 79.49,69.727 58.5,69.727 58.451,69.718 58.41,69.69 54.247,65.527 34.627,65.527 34.627,79.49 79.49,79.49
+5.0V on Power Plane (split plane): 79.49,56.627 44.927,56.627 44.927,65.273 54.3,65.273 54.349,65.282 54.39,65.31 58.553,69.473 79.49,69.473

## Other copper
Top Layer:
  rectangle net NetC19_1: 56.21,50.165 61.138,55.067
  rectangle net GND: 67.412,49.047 68.555,52.857
  rectangle net GND: 70.256,51.079 71.018,51.486
  rectangle net NetC19_1: 56.185,47.828 58.115,51.029
  rectangle net NetC19_1: 59.207,54.407 64.668,55.042
  rectangle net GND: 66.675,49.047 68.555,50.038
  rectangle net NetC19_1: 63.932,54.356 66.319,55.397
  rectangle net +12.0V: 60.706,45.898 64.491,47.269
  rectangle net NetC21_2: 70.663,56.286 73.457,57.48
  rectangle net NetC21_2: 62.382,60.401 65.049,63.957
  rectangle net NetC21_2: 64.033,58.979 65.049,63.957
  rectangle net NetC21_2: 64.033,58.979 73.33,59.614
  rectangle net NetC21_2: 72.619,57.836 73.33,59.614
  rectangle net NetC21_2: 71.679,54.305 73.152,54.737
  rectangle net NetC21_2: 72.619,57.836 74.6,58.395
  rectangle net NetC21_2: 72.619,53.67 73.482,58.395
  rectangle net NetC21_2: 72.009,53.67 73.152,54.102
  rectangle net NetC21_2: 72.009,53.67 72.619,54.102
  rectangle net GND: 70.206,48.26 70.587,51.511
  rectangle net GND: 72.009,51.079 73.05,51.435
  rectangle net GND: 72.669,51.029 73.254,52.146
  rectangle net GND: 72.034,51.689 73.254,52.146
  rectangle net +5.0V: 68.783,60.249 71.476,63.957
  rectangle net +5.0V: 68.758,63.322 70.587,67.234
  rectangle net +5.0V: 71.933,60.249 76.86,63.856
  rectangle net +5.0V: 74.905,50.419 76.86,63.856
  rectangle net +5.0V: 72.187,50.419 76.86,50.825
  rectangle net +5.0V: 59.411,64.821 70.587,67.234
  rectangle net NetCN3_1: 66.37,36.297 69.698,37.922
  rectangle net NetCN3_1: 66.37,36.297 67.488,47.168
Bottom Layer:
  rectangle net NetCN3_2: 61.392,40.818 72.441,42.596
  rectangle net NetCN3_2: 71.095,36.119 75.463,37.668
  rectangle net NetCN3_2: 71.095,36.119 72.441,42.469
  rectangle net GND: 52.553,53.289 57.48,54.356
  rectangle net NetC21_2: 73.914,57.836 74.6,58.395
  rectangle net GND: 72.644,50.927 73.609,63.373
  rectangle net GND: 72.644,61.976 75.997,63.449
  rectangle net GND: 75.209,50.419 75.895,52.121
  rectangle net GND: 76.505,50.444 77.216,52.095
  rectangle net GND: 77.8,50.419 78.537,52.121
  rectangle net GND: 72.644,50.419 78.537,50.927
  rectangle net GND: 72.644,50.419 73.609,51.537
  rectangle net +5.0V: 68.783,59.157 70.307,63.957
  rectangle net +5.0V: 68.199,59.157 70.307,60.401
  rectangle net +5.0V: 62.306,59.157 69.266,60.401
Ground Plane (plane layer: these items are gaps in the copper):
  lines w0.25: 34.3,80.1 34.3,65.3 54.3,65.3 58.5,69.5 70.6,69.5 70.6,72.15 70.6,77.45 70.6,80.1
Power Plane (plane layer: these items are gaps in the copper):
  lines w0.25: 34.5,80 34.5,65.4 54.3,65.4 58.5,69.6 70.5,69.6 70.7,69.6 76.7,69.6 76.903,69.6 78.5,69.6 79.7,69.6 80,69.9 ; 44.8,65.4 44.8,56.5 53.6,56.5 ; 79.8,33.9 64.4,33.9 53.6,44.7 53.6,56.5 ; 79.9,56.5 53.6,56.5 ; 24.5,56 24.5,64 29.4,64 29.5,63.9 29.5,58.9 43.4,58.9 43.4,47.4 30.3,47.4 30.3,53.2 37,53.2 37,58.6 29.5,58.6 29.5,56 29.4,56 24.5,56

## Silkscreen, mask and mechanical layers (free items; w line width, h text height)
Outline:
  the board outline again, w0.254